# Altium PCB Orient.PcbDoc (part 1 of 4)
Units mil, origin at the board's own origin, x right, y up, seen from the top; angles counter-clockwise.
Board outline 3600 x 2400 mil, 4 copper layers (Top Layer, Layer 1, Layer 2, Bottom Layer), stack 23.756 mil thick; 365 components, 303 nets, 1656 pads, 303 vias.
Unrouted connection lines stored in the file: 1026.
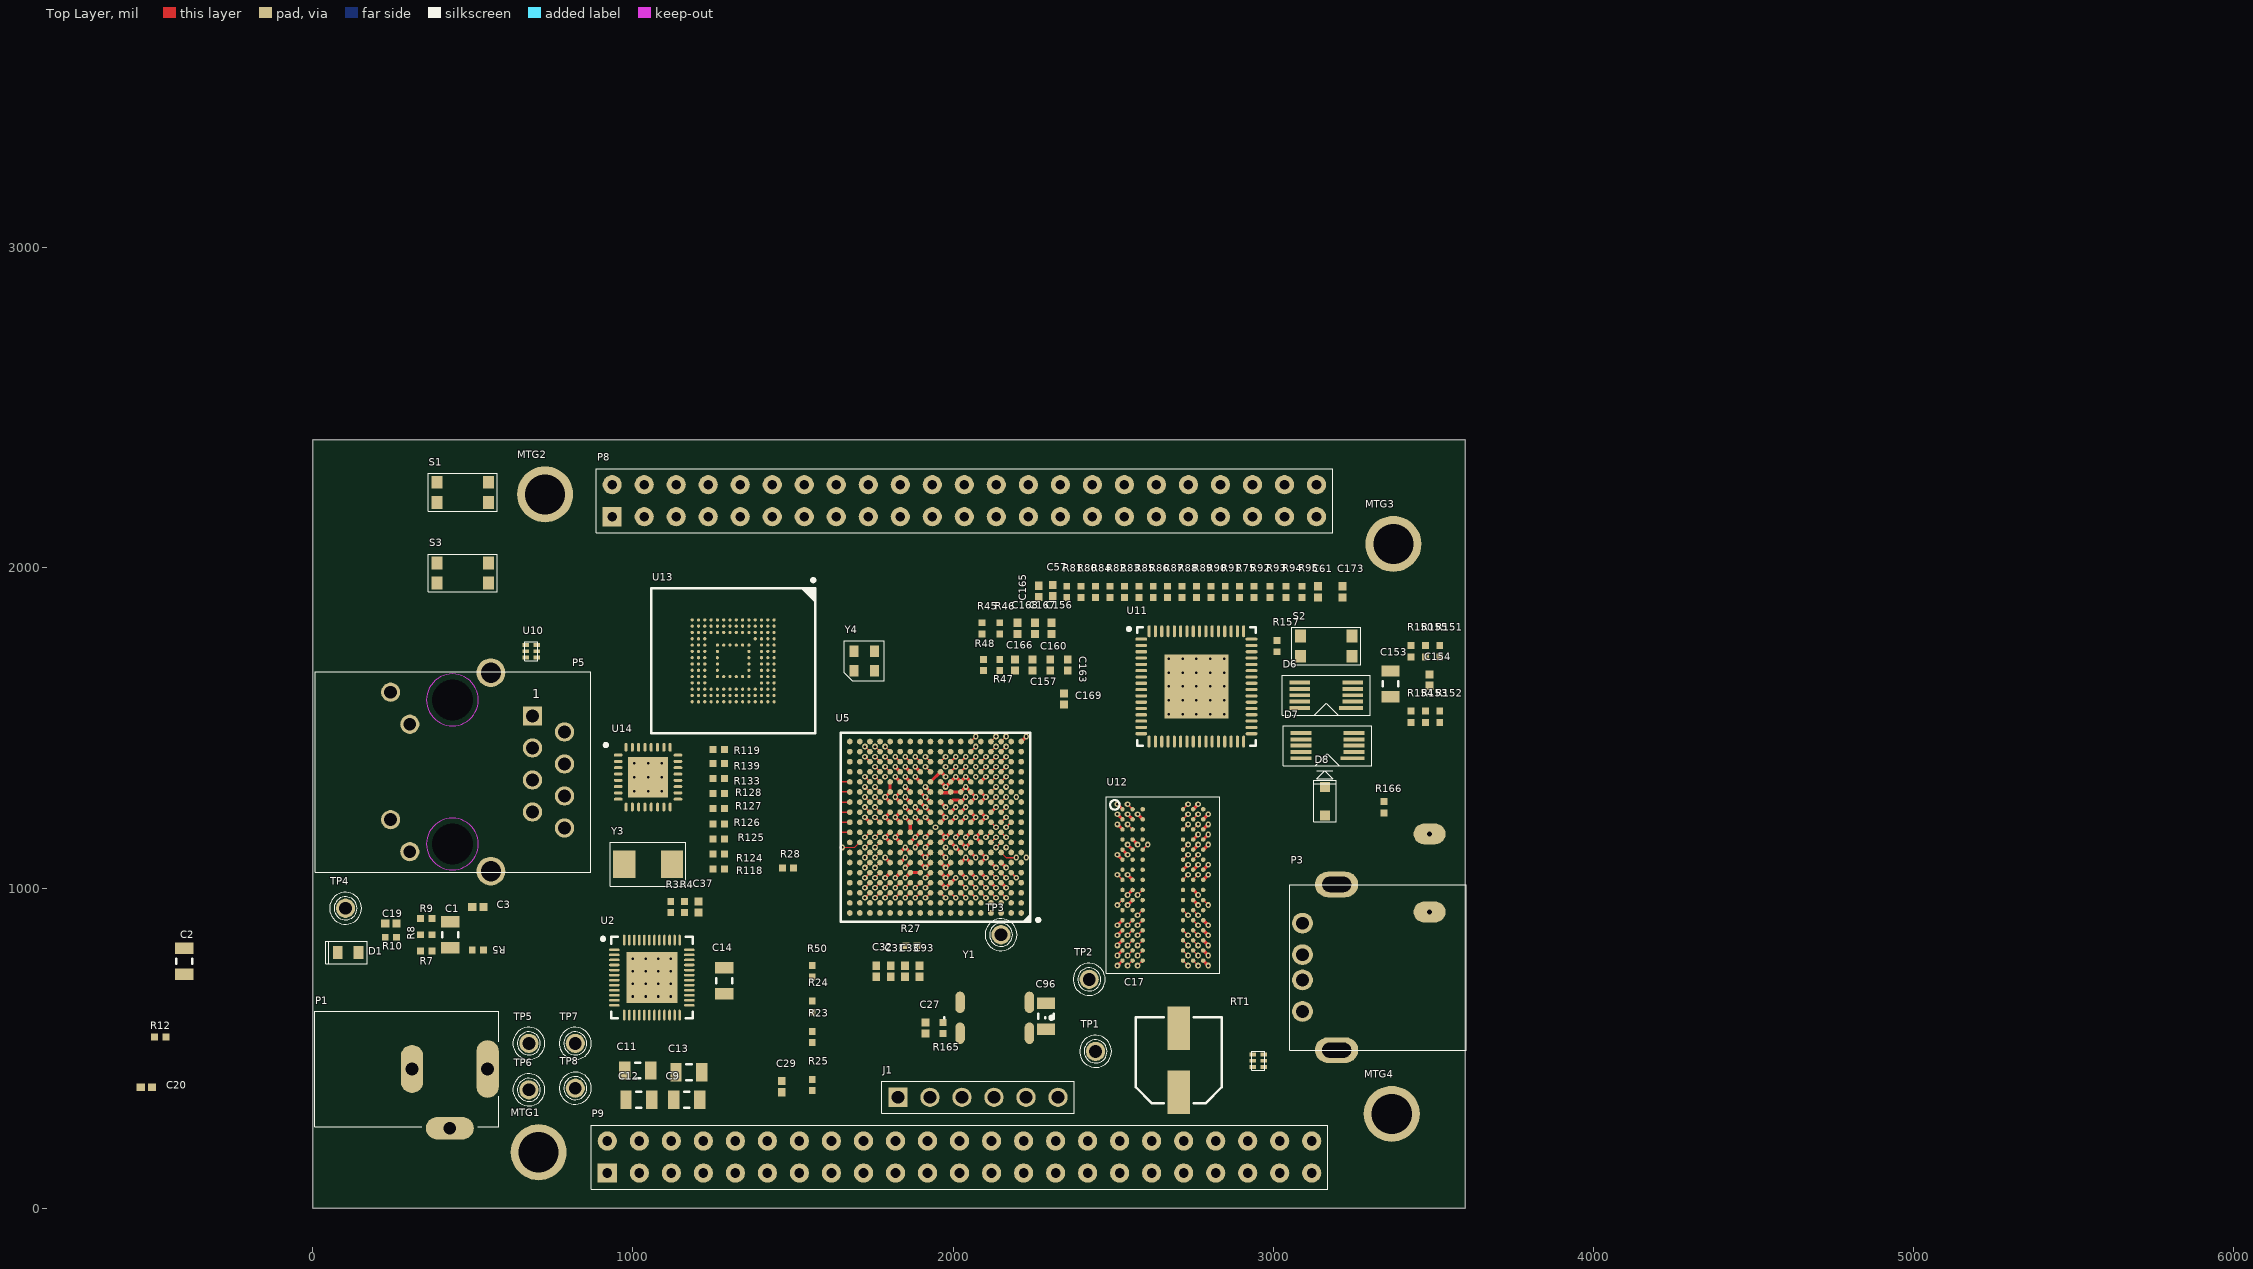
[diagram p0: Top Layer view]
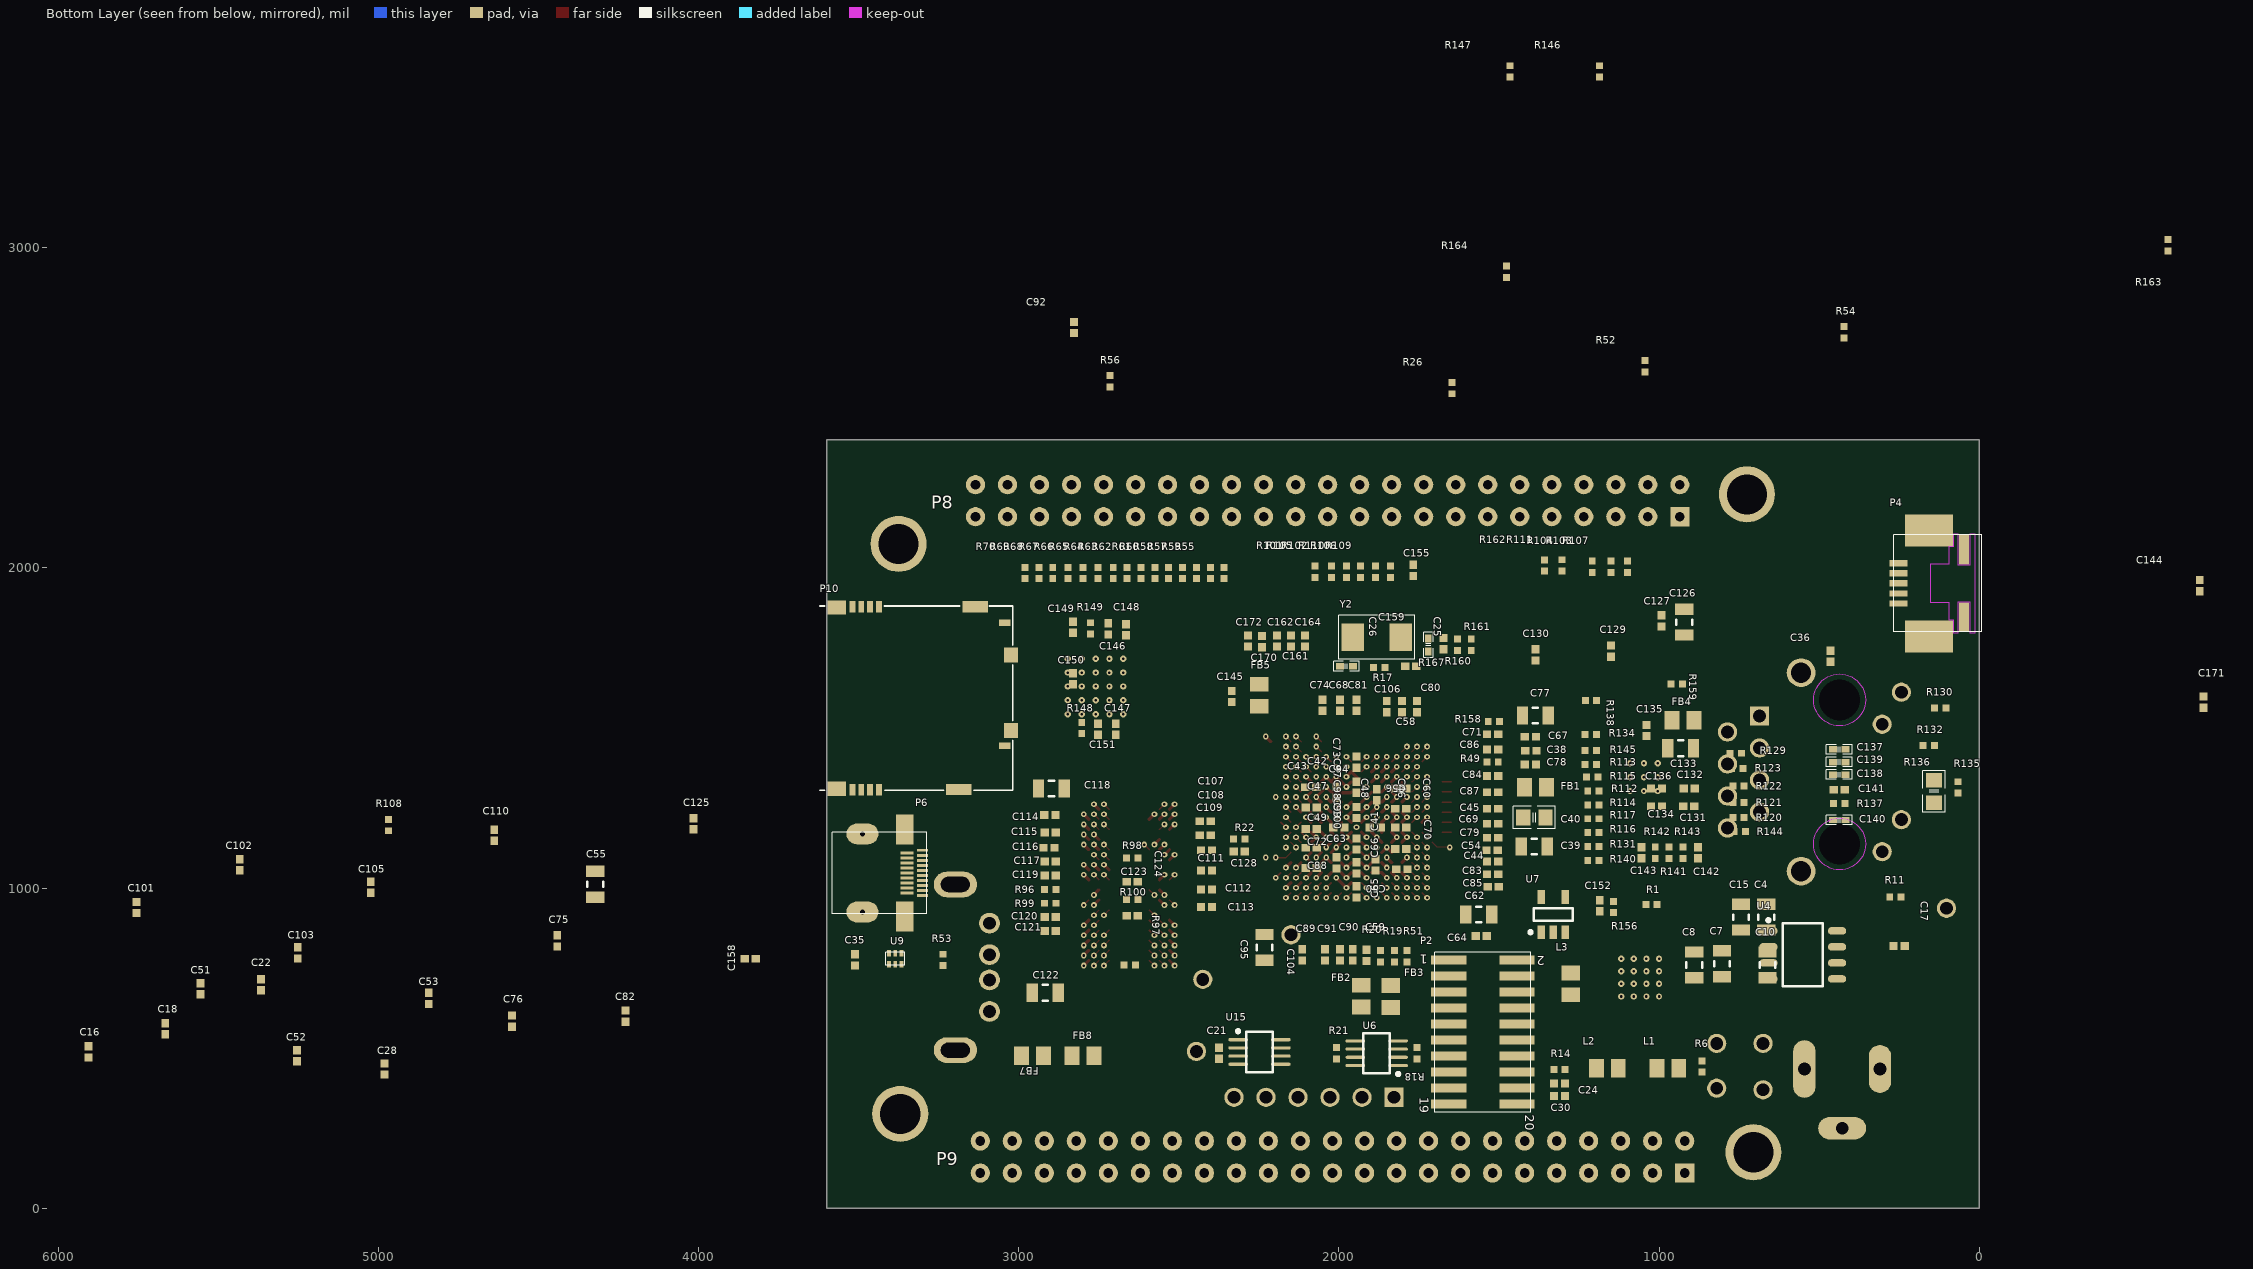
[diagram p1: Bottom Layer view, seen from below]
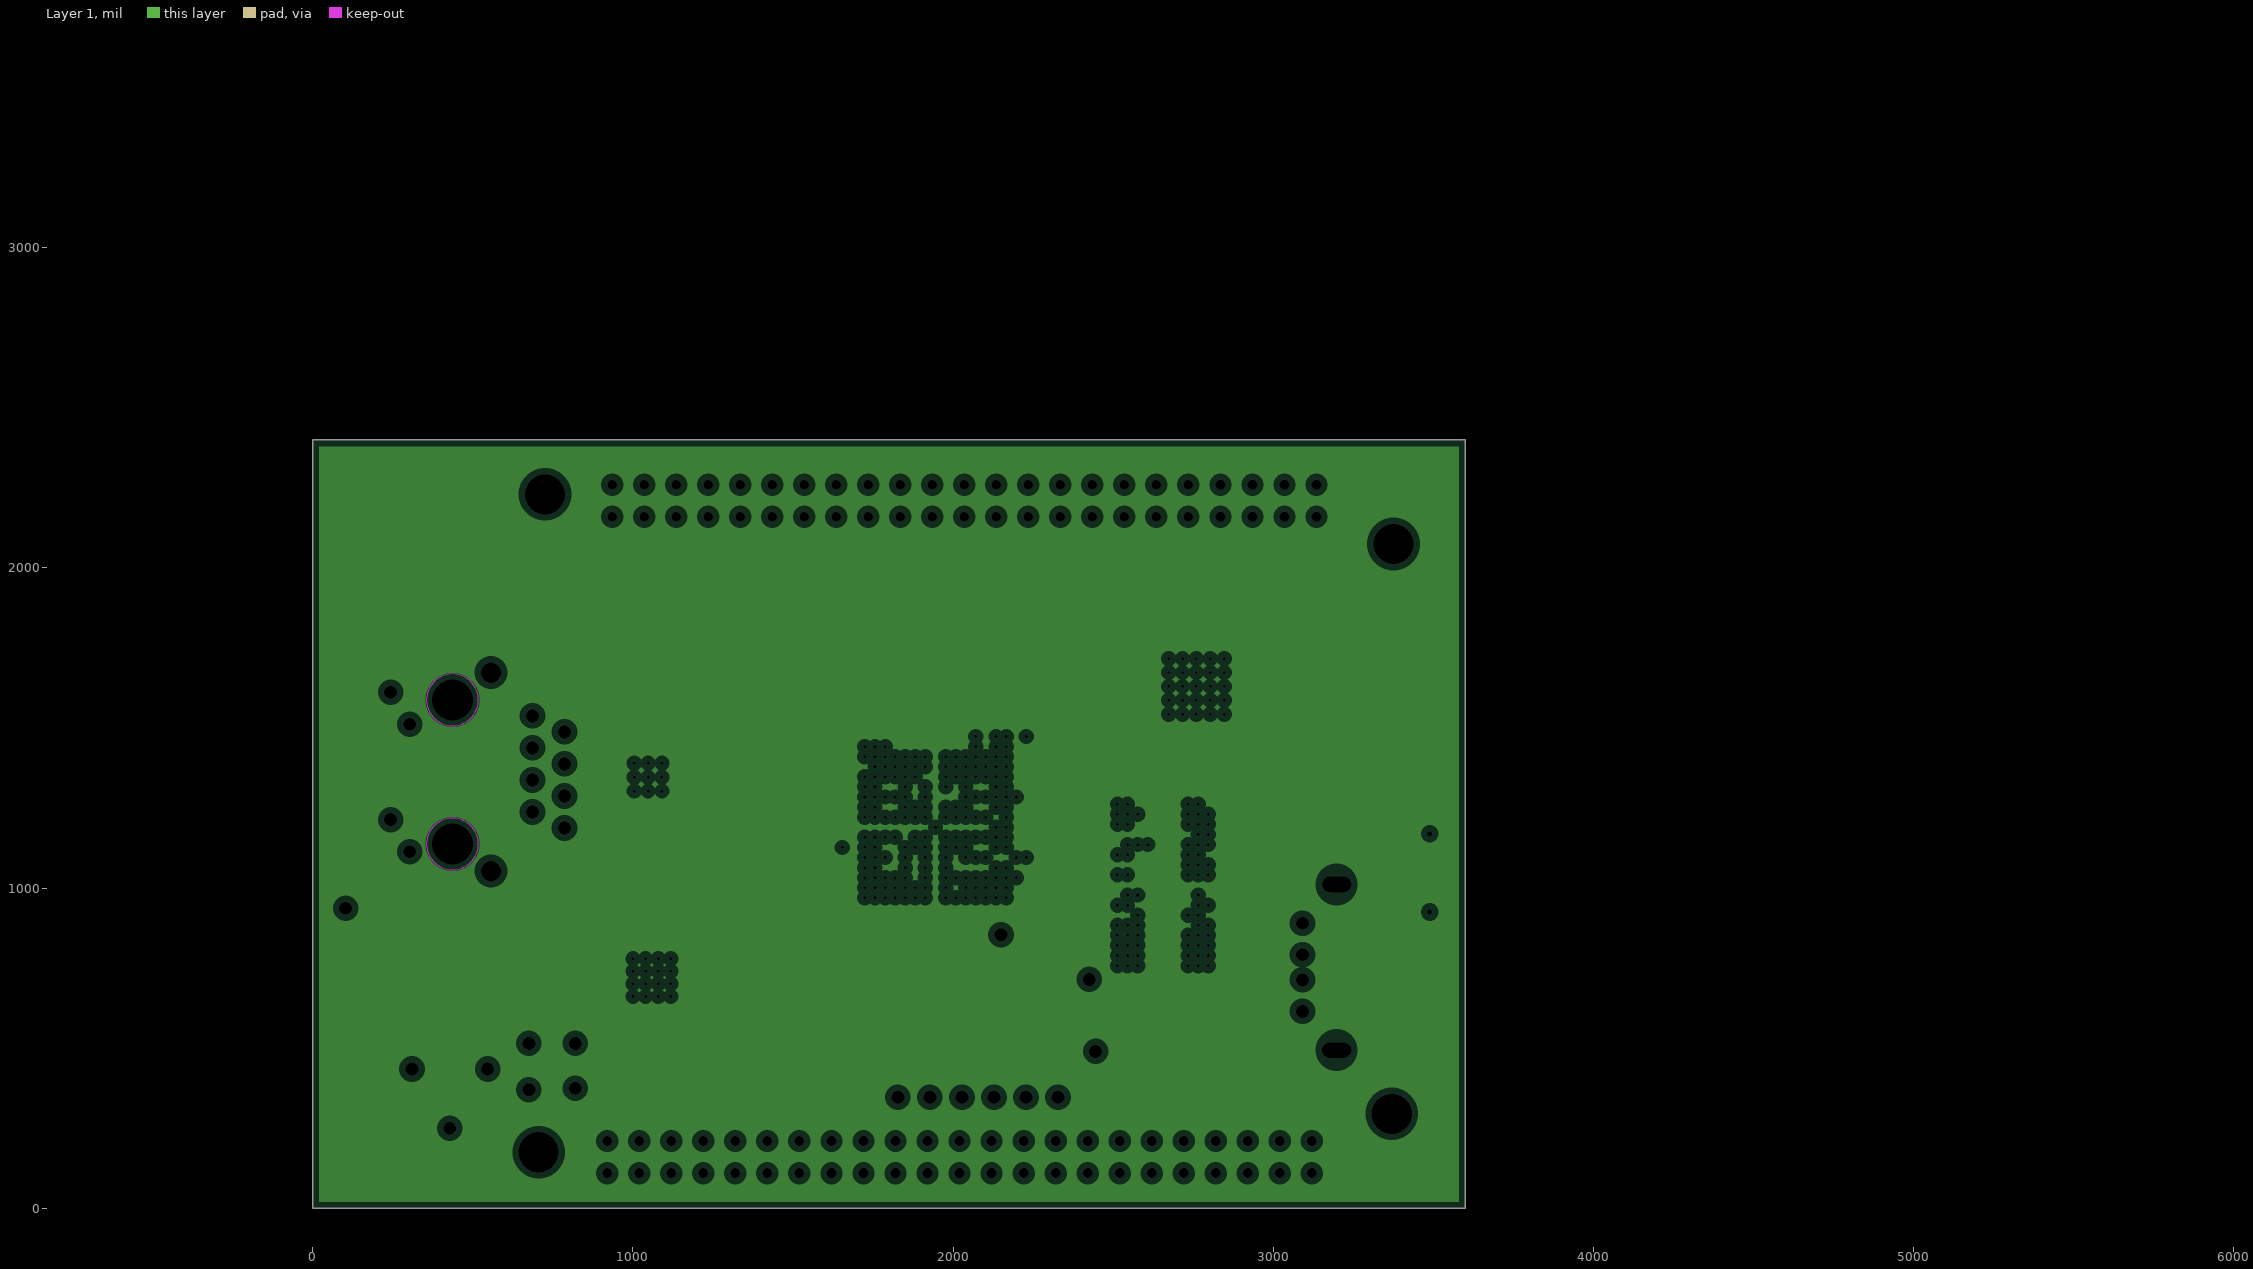
[diagram p2: Layer 1, clearances drawn from the general rule]
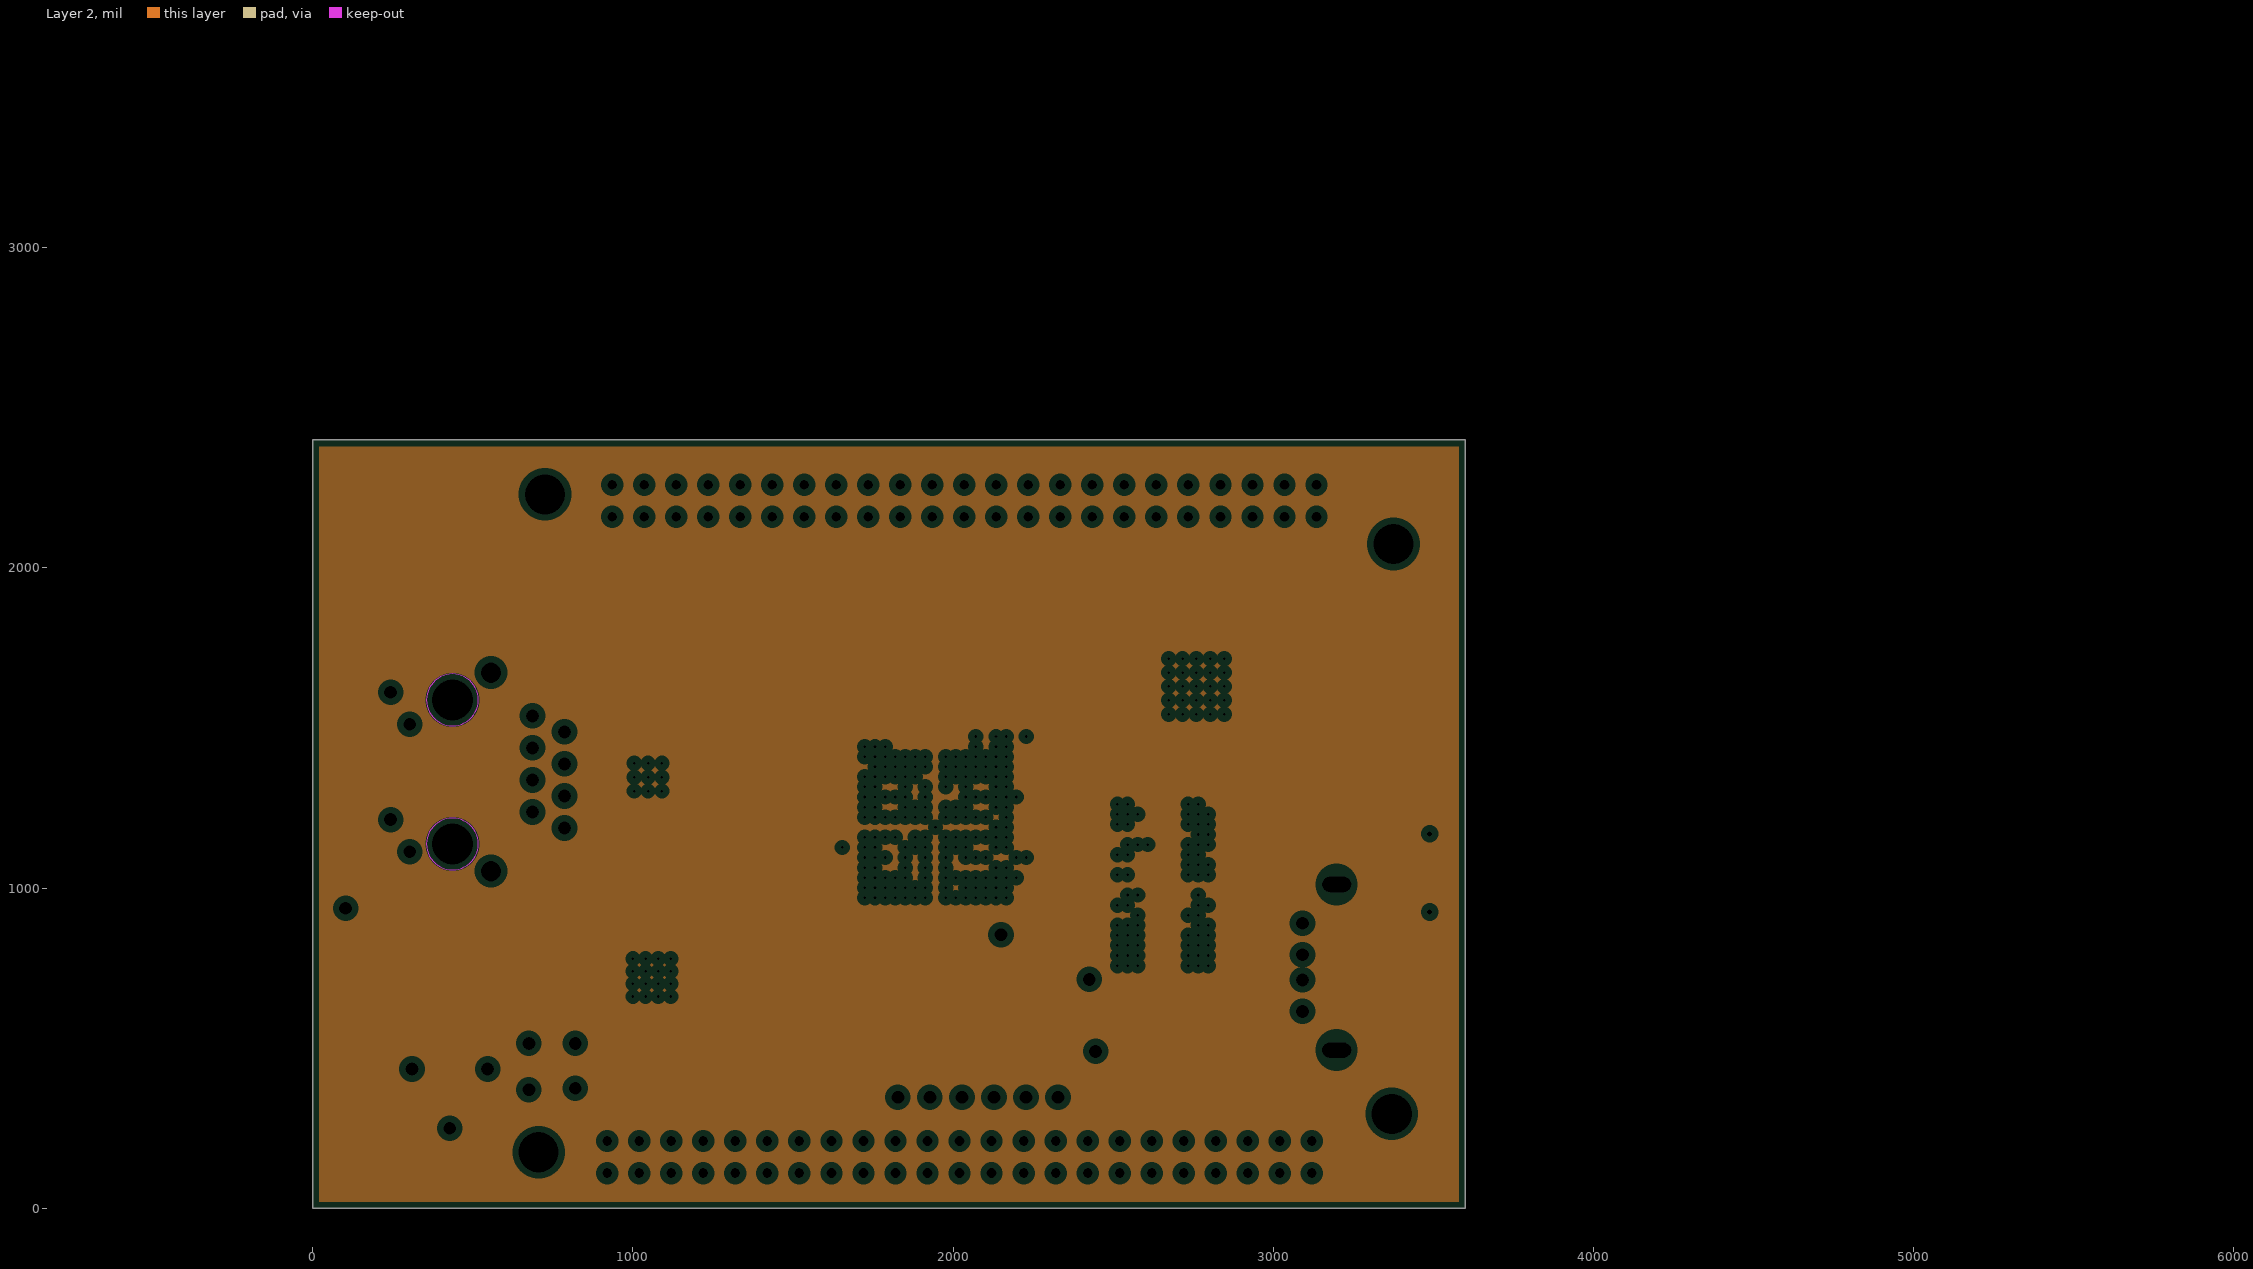
[diagram p3: Layer 2, clearances drawn from the general rule]

## Layer stack, top to bottom
Top Solder: solder mask 0.4, Solder Resist, Dk 3.5
Top Layer: signal copper 1.4
Dielectric 2: prepreg 2.8, PP-006, Dk 4.1
Layer 1: plane copper 1.3779
Dielectric 1: dielectric 12.6, FR-4, Dk 4.8
Layer 2: plane copper 1.3779
Dielectric 3: prepreg 2.8, PP-006, Dk 4.1
Bottom Layer: signal copper 1.4
Bottom Solder: solder mask 0.4, Solder Resist, Dk 3.5

## Board outline
3600,2400 0,2400 0,0 3600,0

## Design rules (kind name [scope] priority, off if disabled: settings)
Clearance [All] p1: gap=10 ignorepadtopadclearanceinfootprint=FALSE except(0: Arc-Hole Track-Hole SMDPad-Hole THPad-Hole Via-Hole Fill-Hole Poly-Hole Region-Hole Text-Hole)
PlaneClearance [All] p1: clearance=20
PlaneConnect [All] p1: planeconnectstyle=Relief reliefexpansion=20 reliefentries=4 reliefconductorwidth=10 reliefairgap=10
PolygonConnect [All] p1: connectstyle=Relief reliefconductorwidth=10 reliefentries=4 polygonreliefangle="90 Angle" airgapwidth=10
RoutingVias [All] p1: holewidth=28 width=50 viastyle="Through Hole" minholewidth=28 minwidth=50 maxholewidth=28 maxwidth=50
SolderMaskExpansion [All] p1: expansion=4
Width [All] p1: maxlimit=10 minlimit=10 preferedwidth=10
28 further rules are at their usual default settings.

## Classes and differential pairs
component class "P10_HDMI Framer": C144 C145 C146 C147 C148 C149 C150 C151 C156 C157 C160 C161 C162 C163 C164 C165 C166 C167 C168 C169 C170 C171 C172 C173 D6 D7 D8 FB5 P6 R146 R147 R148 R149 R158 R166 RT1 U11
component class P09_Ethernet: C131 C132 C133 C134 C135 C136 C137 C138 C139 C140 C141 C142 C143 FB4 P5 R112 R113 R114 R115 R116 R117 R118 R119 R120 R121 R122 R123 R124 R125 R126 R127 R128 R129 R130 R131 R132 R133 R134 R135 R136 R137 R138 R139 R140 R141 R142 R143 R144 R145 U14 Y3
net class DDR_D[15..0]: DDR_D0 DDR_D1 DDR_D2 DDR_D3 DDR_D4 DDR_D5 DDR_D6 DDR_D7 DDR_D8 DDR_D9 DDR_D10 DDR_D11 DDR_D12 DDR_D13 DDR_D14 DDR_D15
net class DDR_BA[2..0]: DDR_BA0 DDR_BA1 DDR_BA2
net class DDR_A[15..0]: DDR_A0 DDR_A1 DDR_A2 DDR_A3 DDR_A4 DDR_A5 DDR_A6 DDR_A7 DDR_A8 DDR_A9 DDR_A10 DDR_A11 DDR_A12 DDR_A13 DDR_A14 DDR_A15
component class "P11_Exp Conn, uSD, and": C152 C153 C154 P8 P9 P10 R150 R151 R152 R153 R154 R155 R156 R157 TP4 U7
component class P08_eMMC: C125 C126 C127 C128 C129 C130 R101 R102 R103 R104 R105 R106 R107 R108 R109 R110 R111 U13
component class "P07_DDR3 Memory": C107 C108 C109 C110 C111 C112 C113 C114 C115 C116 C117 C118 C119 C120 C121 C122 C123 C124 R96 R97 R98 R99 R100 U12
component class "P06_LED, Config, & Button": R55 R56 R57 R58 R59 R60 R61 R62 R63 R64 R65 R66 R67 R68 R69 R70 R75 R80 R81 R82 R83 R84 R85 R86 R87 R88 R89 R90 R91 R92 R93 R94 R95 S2
component class "P05_Processor Page 3 of 3": C37 C38 C39 C40 C41 C42 C43 C44 C45 C46 C47 C48 C49 C50 C51 C52 C53 C54 C55 C56 C57 C58 C59 C60 C61 C62 C63 C64 C65 C66 C67 C68 C69 C70 C71 C72 C73 C74 C75 C76 C77 C78 C79 C80 C81 C82 C83 C84 C85 C86 C87 C88 C89 C90 C91 C92 C93 C94 C95 C96 C97 C98 C99 C100 C101 C102 C103 C104 C105 C106 FB1 FB2 FB3 R54 TP2 TP3
component class "P04_Processor 2 or 3, USB and Serial": C17 C31 C32 C33 C35 C36 C155 FB7 FB8 J1 P3 P4 R26 R27 R28 R45 R46 R47 R48 R49 R50 R51 R52 R53 R159 R163 R164 R165 U8 U9 U10 U15
component class "P03_Processor 1 of 3, JTAG Header": C21 C22 C24 C25 C26 C27 C28 C29 C30 C158 C159 P2 R14 R17 R18 R19 R20 R21 R22 R23 R24 R25 R160 R161 R162 R167 S1 U3 U5 U6 Y1 Y2 Y4
component class "P02_Power Management": C1 C2 C3 C4 C7 C8 C9 C10 C11 C12 C13 C14 C15 C16 C17 C18 C19 C20 D1 L1 L2 L3 MTG1 MTG2 MTG3 MTG4 P1 R1 R3 R4 R5 R6 R7 R8 R9 R10 R11 R12 S3 TP1 TP5 TP6 TP7 TP8 U2 U4

## Components (designator, comment, footprint, x,y, rotation, side; value= is the part's Value field where it differs from the comment)
C1 "C2012X6S1A106K085AC" CAP0805 429.13,854.33 r90 top
C2 "C2012X6S1A106K085AC" CAP0805 -401.57,771.65 r90 top
C3 "C0402C104K4RACTU" CAP0402 515.75,940.94 r180 top
C4 "C2012X6S1A106K085AC" CAP0805 665.35,909.45 r270 bottom
C7 "C2012X6S1A106K085AC" CAP0805 803.15,763.78 r270 bottom
C8 "C2012X6S1A106K085AC" CAP0805 889.76,759.84 r270 bottom
C9 "C2012X6S1A106K085AC" CAP0805 1168.31,338.58 r180 top
C10 "C2012X6S1A106K085AC" CAP0805 661.42,759.84 r270 bottom
C11 "C2012X6S1A106K085AC" CAP0805 1015,430 r0 top
C12 "C2012X6S1A106K085AC" CAP0805 1018.7,338.58 r180 top
C13 "C2012X6S1A106K085AC" CAP0805 1175,425 r0 top
C14 "C2012X6S1A106K085AC" CAP0805 1285,710.79 r90 top
C15 "C2012X6S1A106K085AC" CAP0805 744.09,909.45 r270 bottom
C16 "C1005X5R0J225K050BC" CAP0402 5905.64,488.49 r90 bottom
C17 "EEE-0JA101SP" CAP6.6x6.6 2704.72,462.6 r90 top
C17 "C1005X5R0J225K050BC" CAP0402 250.39,818.9 r180 bottom
C18 "C1005X5R0J225K050BC" CAP0402 5665.48,560.93 r90 bottom
C19 "GRM155R71H471KA01D" CAP0402 244.09,889.76 r180 top
C20 "C0402C104K4RACTU" CAP0402 -519.68,377.95 r180 top
C21 "18pF, 50V" CAP0402 2374.02,484.25 r270 bottom
C22 "18pF, 50V" CAP0402 5366.14,697.79 r90 bottom
C24 "1uF, 10V" CAP0402 1311.02,389.76 r180 bottom
C25 "18pF, 50V" CAP0402 1775.28,1692.91 r180 bottom
C26 "18pF, 50V" 402 1976.38,1692.91 r180 bottom
C27 "C0402C104K4RACTU" CAP0402 1913.39,562.99 r90 top
C28 "C0402C104K4RACTU" CAP0402 4980.44,434.94 r90 bottom
C29 "C0402C104K4RACTU" CAP0402 1465,380 r90 top
C30 "C0402C104K4RACTU" CAP0402 1311.02,350.39 r180 bottom
C31 "C0402C104K4RACTU" CAP0402 1805,740 r90 top
C32 "1nF, 50V" CAP0402 1760,740 r90 top
C33 "C0402C104K4RACTU" CAP0402 1850,740 r90 top
C35 "C0402C104K4RACTU" CAP0402 3511.81,775.59 r270 bottom
C36 "C0402C104K4RACTU" CAP0402 464.57,1724.41 r90 bottom
C37 "C0402C104K4RACTU" CAP0402 1204.72,940.94 r90 top
C38 "C0402C104K4RACTU" CAP0402 1400.32,1429.13 r180 bottom
C39 "10uF, 10V" CAP0805 1389.76,1129.92 r180 bottom
C40 "10uF, 10V" 805 1389.76,1220.47 r180 bottom
C41 "C0402C104K4RACTU" CAP0402 1807.09,1311.02 r0 bottom
C42 "C0402C104K4RACTU" CAP0402 1945,1314.96 r90 bottom
C43 "C0402C104K4RACTU" CAP0402 2007.87,1299.21 r90 bottom
C44 "C0402C104K4RACTU" CAP0402 1520,1082.68 r180 bottom
C45 "C0402C104K4RACTU" CAP0402 1520,1248.03 r0 bottom
C46 "C0402C104K4RACTU" CAP0402 1885.83,1188.98 r180 bottom
C47 "C0402C104K4RACTU" CAP0402 1945,1236.22 r90 bottom
C48 "C0402C104K4RACTU" CAP0402 2000,1188.98 r180 bottom
C49 "C0402C104K4RACTU" CAP0402 1945,1137.8 r90 bottom
C50 "C0402C104K4RACTU" CAP0402 2007.87,1078.74 r270 bottom
C51 "C0402C104K4RACTU" CAP0402 5555.24,685.34 r90 bottom
C52 "C0402C104K4RACTU" CAP0402 5253.67,476.48 r90 bottom
C53 "C0402C104K4RACTU" CAP0402 4842.65,655.42 r90 bottom
C54 "C0402C104K4RACTU" CAP0402 1521.57,1118.11 r180 bottom
C55 "10uF, 10V" CAP0805 4322.83,1011.81 r90 bottom
C56 "C0402C104K4RACTU" CAP0402 1945,1393.7 r270 bottom
C57 "C0402C104K4RACTU" CAP0402 2311.02,1929.13 r90 top
C58 "C0402C104K4RACTU" CAP0402 1803.15,1566.93 r90 bottom
C59 "C0402C104K4RACTU" CAP0402 1913.39,789.76 r90 bottom
C60 "C0402C104K4RACTU" CAP0402 1807.09,1188.98 r180 bottom
C61 "C0402C104K4RACTU" CAP0402 3140,1925 r90 top
C62 "10uF, 10V" CAP0805 1562.99,917.32 r180 bottom
C63 "C0402C104K4RACTU" CAP0402 1885.83,1072.44 r90 bottom
C64 "C0402C104K4RACTU" CAP0402 1555.12,850.39 r0 bottom
C65 "C0402C104K4RACTU" CAP0402 1807.09,1122.05 r0 bottom
C66 "C0402C104K4RACTU" CAP0402 1807.09,1248.03 r0 bottom
C67 "C0402C104K4RACTU" CAP0402 1401.89,1472.44 r180 bottom
C68 "C0402C104K4RACTU" CAP0402 1996.06,1570.87 r90 bottom
C69 "C0402C104K4RACTU" CAP0402 1520,1200.79 r180 bottom
C70 "C0402C104K4RACTU" CAP0402 1803.15,1059.06 r180 bottom
C71 "C0402C104K4RACTU" CAP0402 1520,1480.31 r180 bottom
C72 "C0402C104K4RACTU" CAP0402 1945,1062.99 r90 bottom
C73 "C0402C104K4RACTU" CAP0402 2088.19,1314.96 r180 bottom
C74 "C0402C104K4RACTU" CAP0402 2051.18,1570.87 r90 bottom
C75 "C0402C104K4RACTU" CAP0402 4441.07,834.94 r90 bottom
C76 "C0402C104K4RACTU" CAP0402 4582.8,584.55 r90 bottom
C77 "10uF, 10V" CAP0805 1386.14,1539.37 r180 bottom
C78 "C0402C104K4RACTU" CAP0402 1401.89,1385.83 r180 bottom
C79 "C0402C104K4RACTU" CAP0402 1520,1157.48 r180 bottom
C80 "C0402C104K4RACTU" CAP0402 1755.91,1566.93 r90 bottom
C81 "C0402C104K4RACTU" CAP0402 1944.88,1570.87 r90 bottom
C82 "C0402C104K4RACTU" CAP0402 4228.47,600.3 r90 bottom
C83 "C0402C104K4RACTU" CAP0402 1520,1043.31 r180 bottom
C84 "C0402C104K4RACTU" CAP0402 1520,1350.39 r0 bottom
C85 "C0402C104K4RACTU" CAP0402 1518.11,1003.94 r180 bottom
C86 "C0402C104K4RACTU" CAP0402 1520,1433.07 r180 bottom
C87 "C0402C104K4RACTU" CAP0402 1520,1299.21 r0 bottom
C88 "C0402C104K4RACTU" CAP0402 1945,988.19 r90 bottom
C89 "1uF, 10V" CAP0402 2043.31,791.34 r90 bottom
C90 "1uF, 10V" CAP0402 1956.69,791.34 r90 bottom
C91 "1uF, 10V" CAP0402 1996.06,791.34 r90 bottom
C92 "C0402C104K4RACTU" CAP0402 2827.17,2751.05 r90 bottom
C93 "C0402C104K4RACTU" CAP0402 1895,740 r90 top
C94 "C0402C104K4RACTU" CAP0402 1881.89,1291.34 r90 bottom
C95 "10uF, 10V" CAP0805 2232.28,814.53 r90 bottom
C96 "10uF, 10V" CAP0805 2290,600 r90 top
C97 "C0402C104K4RACTU" CAP0402 2086.61,1251.97 r180 bottom
C98 "C0402C104K4RACTU" CAP0402 2086.61,1185.04 r180 bottom
C99 "C0402C104K4RACTU" CAP0402 2086.61,1125.98 r180 bottom
C100 "C0402C104K4RACTU" CAP0402 2086.61,1062.99 r180 bottom
C101 "C0402C104K4RACTU" CAP0402 5755.91,939.37 r90 bottom
C102 "C0402C104K4RACTU" CAP0402 5433.07,1073.23 r90 bottom
C103 "C0402C104K4RACTU" CAP0402 5251.97,797.64 r90 bottom
C104 "1uF, 10V" CAP0402 2114.17,791.34 r90 bottom
C105 "C0402C104K4RACTU" CAP0402 5023.62,1002.36 r90 bottom
C106 "C0402C104K4RACTU" CAP0402 1850.39,1566.93 r90 bottom
C107 "0.1uf, 6V3" CAP0402 2417.32,1208.66 r180 bottom
C108 "0.1uf, 6V3" CAP0402 2417.32,1165.35 r180 bottom
C109 "0.1uf, 6V3" CAP0402 2413.39,1118.11 r180 bottom
C110 "0.1uf, 6V3" CAP0402 4637.8,1165.04 r90 bottom
C111 "0.1uf, 6V3" CAP0402 2413.39,1055.12 r180 bottom
C112 "0.1uf, 6V3" CAP0402 2413.39,996.06 r180 bottom
C113 "0.1uf, 6V3" CAP0402 2413.39,940.94 r180 bottom
C114 "0.1uf, 6V3" CAP0402 2902.51,1228.35 r180 bottom
C115 "0.1uf, 6V3" CAP0402 2901.57,1173.23 r180 bottom
C116 "0.1uf, 6V3" CAP0402 2905.51,1125.98 r180 bottom
C117 "0.1uf, 6V3" CAP0402 2901.57,1082.68 r180 bottom
C118 "10uF, 10V" CAP0805 2897.64,1311.02 r180 bottom
C119 "0.1uf, 6V3" CAP0402 2901.57,1039.37 r180 bottom
C120 "0.1uf, 6V3" CAP0402 2901.57,909.45 r180 bottom
C121 "0.1uf, 6V3" CAP0402 2901.57,866.14 r180 bottom
C122 "10uF, 10V" CAP0805 2917.32,673.23 r0 bottom
C123 "No Comment" CAP0402 2645.67,1019.68 r180 bottom
C124 "0.1uf, 6V3" CAP0402 2645.67,913.39 r180 bottom
C125 "No Comment" CAP0402 4015.75,1200.79 r90 bottom
C126 "10uF, 10V" CAP0805 921.26,1830.71 r270 bottom
C127 "No Comment" CAP0402 992.13,1834.65 r90 bottom
C128 "No Comment" CAP0402 2311.02,1114.17 r0 bottom
C129 "No Comment" CAP0402 1149.61,1740.16 r90 bottom
C130 "No Comment" CAP0402 1385.83,1728.35 r90 bottom
C131 "C0402C104K4RACTU" CAP0402 907.09,1255.91 r0 bottom
C132 "C0402C104K4RACTU" CAP0402 905.51,1311.02 r0 bottom
C133 "10uF, 10V" CAP0805 932.64,1437.01 r180 bottom
C134 "1uF, 10V" CAP0402 1007.87,1255.91 r180 bottom
C135 "C0402C104K4RACTU" CAP0402 1039.37,1492.13 r270 bottom
C136 "470pF, 50V" CAP0402 1007.87,1311.02 r180 bottom
C137 "15pF, DNI" 402 437.01,1433.07 r180 bottom
C138 "15pF, DNI" 402 437.01,1354.33 r180 bottom
C139 "15pF, DNI" 402 437.01,1393.7 r180 bottom
C140 "15pF, DNI" 402 437.01,1212.6 r180 bottom
C141 "0.022uF,10V" CAP0402 437.01,1307.09 r180 bottom
C142 "30pF, 50V" CAP0402 877.95,1110.24 r270 bottom
C143 "30pF, 50V" CAP0402 1055.12,1110.24 r90 bottom
C144 "No Comment" CAP0402 -688.98,1944.88 r90 bottom
C145 "No Comment" CAP0402 2334.65,1598.43 r270 bottom
C146 "No Comment" CAP0402 2720.47,1809.45 r90 bottom
C147 "No Comment" CAP0402 2696.85,1496.06 r90 bottom
C148 "No Comment" CAP0402 2665.35,1807.09 r90 bottom
C149 "No Comment" CAP0402 2830.71,1814.96 r90 bottom
C150 "No Comment" CAP0402 2830.71,1653.54 r90 bottom
C151 "No Comment" CAP0402 2751.97,1496.06 r90 bottom
C152 "C0402C104K4RACTU" CAP0402 1185.04,944.88 r90 bottom
C153 "10uF, 10V" CAP0805 3366.14,1637.8 r90 top
C154 "C0402C104K4RACTU" CAP0402 3488.19,1649.61 r90 top
C155 "C0402C104K4RACTU" CAP0402 1767.72,1992.13 r270 bottom
C156 "No Comment" CAP0402 2307.09,1811.02 r90 top
C157 "No Comment" CAP0402 2248.03,1696.85 r90 top
C158 "C0402C104K4RACTU" CAP0402 3838.58,779.53 r0 bottom
C159 "C0402C104K4RACTU" CAP0402 1673.23,1763.78 r90 bottom
C160 "No Comment" CAP0402 2303.15,1696.85 r90 top
C161 "No Comment" CAP0402 2149.61,1771.65 r90 bottom
C162 "No Comment" CAP0402 2192.91,1771.65 r90 bottom
C163 "No Comment" CAP0402 2358.27,1696.85 r90 top
C164 "No Comment" CAP0402 2106.3,1771.65 r90 bottom
C165 "No Comment" CAP0402 2267.72,1926.77 r90 top
C166 "No Comment" CAP0402 2192.91,1696.85 r90 top
C167 "No Comment" CAP0402 2255.91,1811.02 r90 top
C168 "No Comment" CAP0402 2200.79,1811.02 r90 top
C169 "No Comment" CAP0402 2346.46,1590.55 r90 top
C170 "No Comment" CAP0402 2240.16,1770.08 r90 bottom
C171 "No Comment" CAP0402 -700.79,1581.1 r90 bottom
C172 "No Comment" CAP0402 2283.46,1771.65 r90 bottom
C173 "No Comment" CAP0402 3216.54,1925.2 r90 top
D1 "598-8170-107F" LED_0603 110.24,799.21 r0 top
D6 "32CTQ030/TO_1" TSSOP10 3165.35,1602.36 r90 top
D7 "32CTQ030/TO_1" TSSOP10 3169.29,1444.88 r90 top
D8 "RB751V40,115" SOD323 3161.42,1271.65 r90 top
FB1 "150OHM800mA" FB0805 1386.14,1314.96 r180 bottom
FB2 "150OHM800mA" FB0805 1929.41,662.52 r90 bottom
FB3 "150OHM800mA" FB0805 1838.58,661.42 r90 bottom
FB4 "150OHM800mA" FB0805 925.2,1523.62 r180 bottom
FB5 "150OHM800mA" FB0805 2248.03,1602.36 r90 bottom
FB7 "150OHM800mA" FB0805 2956.69,476.38 r180 bottom
FB8 "150OHM800mA" FB0805 2799.21,476.38 r180 bottom
J1 "HEADER 6" SIP6 2077.56,346.46 r90 top
L1 "2.2uH, 2.6A" FB0805 972.44,437.01 r180 bottom
L2 "2.2uH, 2.6A" FB0805 1161.42,437.01 r180 bottom
L3 "2.2uH, 2.6A" FB0805 1275.59,700.79 r90 bottom
MTG1 "MHOLE" MTGH200C125D_PL 690,175 r180 top
MTG2 "MHOLE" MTGH200C125D_PL 710,2230 r180 top
MTG3 "MHOLE" MTGH200C125D_PL 3359.5,2075 r180 top
MTG4 "MHOLE" MTGH200C125D_PL 3354.5,295 r180 top
P1 "PJ-200A" CONN3-PWR-PJ102A 301,435 r180 top
P2 "CTI JTAG,DNI" HEADER10X2_SMD 1550,550 r90 bottom
P3 "USB-A Conn. - 87520-xx1xx" USB_A 3326.77,751.97 r90 top
P4 "mini USB-B" USB5MINI_4SHIELDED_SMD-5 133.85,1951.77 r180 bottom
P5 "WE_7499010211A" RJ45-7499010211A 433.65,1362.81 r270 top
P6 "10118241-001RLF" CONN19_HDMI 3429.13,1047.24 r90 bottom
P8 "FEMALE HEADER 2x23" HEADER23X2 2035,2210 r0 top
P9 "FEMALE HEADER 2x23" HEADER23X2 2020,160 r0 top
P10 "MOLEX 502570-001" SD-MICRO-SCHA5B0300 3306.59,1593.5 r90 bottom
R1 "RC0402FR-07100KL" RES0402 1023.62,948.82 r0 bottom
R3 "RC0402FR-071K5L" RES0402 1118.11,940.94 r90 top
R4 "RC0402FR-071K5L" RES0402 1161.42,940.94 r90 top
R5 "RC0402JR-070RL" RES0402 515.75,807.09 r180 top
R6 "RC0402JR-070RL" RES0402 866.14,442.91 r270 bottom
R7 "RC0402JR-070RL" RES0402 354.33,803.15 r180 top
R8 "RC0402JR-070RL" RES0402 354.33,854.33 r180 top
R9 "RC0402JR-070RL" RES0402 354.33,905.51 r180 top
R10 "RC0402FR-07470KL" RES0402 244.09,846.46 r0 top
R11 "RC0402FR-07280KL" RES0402 261.81,972.44 r0 bottom
R12 "RC0402FR-07820RL" RES0402 -476.38,535.43 r0 top
R14 "10K, 1%" RES0402 1311.02,433.07 r180 bottom
R17 "1M, 1%" RES0402 1874.02,1688.98 r180 bottom
R18 "33, 0402" RES0402 1755.91,484.25 r270 bottom
R19 "RC0402JR-070RL" RES0402 1826.77,787.4 r90 bottom
R20 "RC0402JR-070RL" RES0402 1870.08,787.4 r90 bottom
R21 "33, 0402" RES0402 2007.87,484.25 r270 bottom
R22 "49.9, 1%" RES0402 2311.02,1153.54 r180 bottom
R23 "4.75K, 1%" RES0402 1560,535 r90 top
R24 "4.75K, 1%" RES0402 1560,630 r90 top
R25 "4.75K, 1%" RES0402 1560,385 r90 top
R26 "4.75K, 1%" RES0402 1646.08,2561.74 r90 bottom
R27 "RC0402JR-070RL" RES0402 1870,820 r180 top
R28 "RC0402FR-0733RL" RES0402 1484.25,1062.99 r180 top
R45 "RC0402FR-0733RL" RES0402 2090.55,1811.02 r90 top
R46 "RC0402FR-0733RL" RES0402 2145.67,1811.02 r90 top
R47 "RC0402FR-0733RL" RES0402 2145.67,1696.85 r90 top
R48 "RC0402FR-0733RL" RES0402 2094.49,1696.85 r90 top
R49 "RC0402JR-070RL" RES0402 1520,1393.7 r180 bottom
R50 "RC0402JR-070RL" RES0402 1560,740 r90 top
R51 "RC0402JR-070RL" RES0402 1787.4,787.4 r90 bottom
R52 "10k, 1%" RES0402 1043.85,2629.61 r90 bottom
R53 "10k, 1%" RES0402 3236.22,775.59 r90 bottom
R54 "10k, 1%" RES0402 421.8,2736.22 r90 bottom
R55 "100K, 1%, DNI" RES0402 2358.27,1984.25 r90 bottom
R56 "100K, 1%" RES0402 2715,2582.68 r90 bottom
R57 "100K, 1%, DNI" RES0402 2444.88,1984.25 r90 bottom
R58 "100K, 1%,DNI" RES0402 2488.19,1984.25 r90 bottom
R59 "100K, 1%, DNI" RES0402 2401.57,1984.25 r90 bottom
R60 "100K, 1%,DNI" RES0402 2531.5,1984.25 r90 bottom
R61 "100K, 1%,DNI" RES0402 2574.8,1984.25 r90 bottom
R62 "100K, 1%,DNI" RES0402 2618.11,1984.25 r90 bottom
R63 "100K, 1%,DNI" RES0402 2661.42,1984.25 r90 bottom
R64 "100K, 1%,DNI" RES0402 2704.72,1984.25 r90 bottom
R65 "100K, 1%" RES0402 2751.97,1984.25 r90 bottom
R66 "100K, 1%" RES0402 2799.21,1984.25 r90 bottom
R67 "100K, 1%" RES0402 2846.46,1984.25 r90 bottom
R68 "100K, 1%" RES0402 2893.7,1984.25 r90 bottom
R69 "100K, 1%, DNI" RES0402 2937.01,1984.25 r90 bottom
R70 "100K, 1%,DNI" RES0402 2980.31,1984.25 r90 bottom
R75 "100" RES0402 2895,1925 r270 top
R80 "100K, 1%" RES0402 2400,1925 r90 top
R81 "100K, 1%, DNI" RES0402 2355,1925 r90 top
R82 "100K, 1%" RES0402 2490,1925 r90 top
R83 "100K, 1%" RES0402 2535,1925 r90 top
R84 "100K, 1%" RES0402 2445,1925 r90 top
R85 "100K, 1%" RES0402 2580,1925 r90 top
R86 "100K, 1%" RES0402 2625,1925 r90 top
R87 "100K, 1%" RES0402 2670,1925 r90 top
R88 "100K, 1%" RES0402 2715,1925 r90 top
R89 "100K, 1%" RES0402 2760,1925 r90 top
R90 "100K, 1%, DNI" RES0402 2805,1925 r90 top
R91 "100K, 1%, DNI" RES0402 2850,1925 r270 top
R92 "100K, 1%, DNI" RES0402 2940,1925 r90 top
R93 "100K, 1%, DNI" RES0402 2990,1925 r90 top
R94 "100K, 1%" RES0402 3040,1925 r90 top
R95 "100K, 1%" RES0402 3090,1925 r90 top
R96 "10k, 1%" RES0402 2901.57,996.06 r0 bottom
R97 "1.5K, 1%" RES0402 2653.54,759.84 r180 bottom
R98 "10k, 1%" RES0402 2645.67,1094.49 r180 bottom
R99 "240, 1%" RES0402 2901.57,952.76 r0 bottom
R100 "10k, 1%" RES0402 2645.67,964.57 r180 bottom
R101 "10k, 1%" RES0402 2074.8,1988.19 r90 bottom
R102 "10k, 1%" RES0402 1976.38,1988.19 r90 bottom
R103 "10k, 1%" RES0402 1149.61,2003.62 r90 bottom
R104 "10k, 1%" RES0402 1208.66,2003.62 r90 bottom
R105 "10k, 1%" RES0402 2023.62,1988.19 r90 bottom
R106 "10k, 1%" RES0402 1885.83,1988.19 r90 bottom
R107 "10k, 1%" RES0402 1098.43,2003.62 r90 bottom
R108 "10k, 1%" RES0402 4968.5,1196.85 r90 bottom
R109 "10k, 1%" RES0402 1838.58,1988.19 r90 bottom
R110 "10k, 1%" RES0402 1933.07,1988.19 r90 bottom
R111 "10k, 1%" RES0402 1303.15,2007.87 r90 bottom
R112 "1.5K, 1%" RES0402 1205.04,1303.15 r180 bottom
R113 "1.5K, 1%" RES0402 1212.91,1385.83 r180 bottom
R114 "1.5K, 1%" RES0402 1205.04,1259.84 r180 bottom
R115 "10k, 1%" RES0402 1208.98,1346.46 r0 bottom
R116 "10k, 1%" RES0402 1205.04,1173.23 r0 bottom
R117 "10k, 1%" RES0402 1205.04,1216.54 r0 bottom
R118 "10k, 1%" RES0402 1267.72,1059.06 r180 top
R119 "1.5K, 1%" RES0402 1267.72,1433.07 r0 top
R120 "49.9, 1%" RES0402 751.97,1220.47 r0 bottom
R121 "49.9, 1%" RES0402 751.97,1267.72 r180 bottom
R122 "49.9, 1%" RES0402 751.97,1318.9 r0 bottom
R123 "49.9, 1%" RES0402 755.91,1374.02 r180 bottom
R124 "10, 1%,DNI" RES0402 1267.72,1106.3 r180 top
R125 "100, 1%" RES0402 1267.72,1153.54 r180 top
R126 "100, 1%" RES0402 1267.72,1200.79 r180 top
R127 "100, 1%" RES0402 1267.72,1248.03 r180 top
R128 "100, 1%" RES0402 1267.72,1295.28 r180 top
R129 "100, 1%" RES0402 760.16,1421.26 r180 bottom
R130 "470, 5%" RES0402 121.73,1562.99 r180 bottom
R131 "100, 1%" RES0402 1205.04,1129.92 r180 bottom
R132 "470, 5%" RES0402 157.48,1444.88 r0 bottom
R133 "100, 1%" RES0402 1267.72,1342.52 r180 top
R134 "100, 1%" RES0402 1212.91,1480.31 r180 bottom
R135 "10k, 1%" RES0402 66.39,1314.46 r90 bottom
R136 "0.1, 0805" 805 141.73,1302.21 r90 bottom
R137 "0R, 1%" RES0402 437.32,1263.78 r180 bottom
R138 "100, 1%" RES0402 1212.6,1586.61 r180 bottom
R139 "100, 1%" RES0402 1267.72,1389.76 r180 top
R140 "0R, 1%,DNI" RES0402 1205.04,1086.61 r180 bottom
R141 "1M, 1%,DNI" RES0402 968.5,1110.24 r90 bottom
R142 "0R, 1%" RES0402 1011.81,1110.24 r90 bottom
R143 "10, 1%" RES0402 925.2,1110.24 r90 bottom
R144 "12.1K, 1%" RES0402 748.03,1177.17 r180 bottom
R145 "10k, 1%" RES0402 1212.91,1429.13 r0 bottom
R146 "1.5K, 1%" RES0402 1185.58,3550.87 r90 bottom
R147 "1.5K, 1%" RES0402 1465.11,3550.87 r90 bottom
R148 "10k, 1%" RES0402 2803.15,1500 r90 bottom
R149 "0R, 1%" RES0402 2775.59,1811.02 r90 bottom
R150 "10k, 1%" RES0402 3430,1740 r270 top
R151 "10k, 1%" RES0402 3520,1740 r270 top
R152 "10k, 1%" RES0402 3520,1535 r270 top
R153 "10k, 1%" RES0402 3475,1535 r270 top
R154 "10k, 1%" RES0402 3430,1535 r270 top
R155 "10k, 1%" RES0402 3475,1740 r270 top
R156 "10k, 1%" RES0402 1141.73,940.94 r90 bottom
R157 "10k, 1%" RES0402 3011.81,1755.91 r270 top
R158 "10k, 1%" RES0402 1515.75,1519.68 r0 bottom
R159 "RC0402JR-070RL" RES0402 944.88,1637.8 r180 bottom
R160 "RC0402JR-070RL" RES0402 1629.92,1759.84 r90 bottom
R161 "RC0402JR-070RL" RES0402 1586.61,1759.84 r90 bottom
R162 "RC0402JR-070RL" RES0402 1358.27,2007.56 r90 bottom
R163 "4.75K, 1%" RES0402 -590.01,3007.87 r90 bottom
R164 "4.75K, 1%" RES0402 1476.38,2925.2 r90 bottom
R165 "RC0402FR-07100KL" RES0402 1968.5,562.99 r90 top
R166 "27K, 1%" RES0402 3346.46,1252.28 r90 top
R167 "33, 0402" 402 1720.47,1759.53 r90 bottom
RT1 "PTC_RXEF010" U_6_DRY 2952.76,460.63 r90 top
S1 "KMR231GLFS" SW4SMD_63X161LS 468.5,2236.22 r180 top
S2 "KMR231GLFS" SW4SMD_63X161LS 3165.35,1755.91 r180 top
S3 "KMR231GLFS" SW4SMD_63X161LS 468.5,1984.25 r180 top
TP1 "TESTPT1" tp1-8040 2445,490 r180 top
TP2 "TESTPT1" tp1-8040 2425,715 r270 top
TP3 "TESTPT1" tp1-8040 2149.61,854.33 r270 top
TP4 "TESTPT1" tp1-8040 102.36,937.01 r180 top
TP5 "TESTPT1" tp1-8040 675,515 r180 top
TP6 "TESTPT1" tp1-8040 675,370 r180 top
TP7 "TESTPT1" tp1-8040 820,515 r180 top
TP8 "TESTPT1" tp1-8040 820,375 r180 top
U2 "TPS65217C" PVQFN-48 1059.06,720.47 r0 top
U4 "TL5209" SOIC-8 551.18,791.34 r180 bottom
U5 "IC_AM335X_ZCE_1" BGA-324 1945,1190 r180 top
U6 "SN74LVC1G74DCTR" VSSOP-8 1881.89,484.25 r0 bottom
U7 "24LC32A" SOT-23-5 1330.71,917.32 r90 bottom
U9 "TPD4S012" U_6_DRY 3385.83,779.53 r180 bottom
U10 "TPD4S012" U_6_DRY 682.28,1739.68 r270 top
U11 "TDA19988" HVQFN-64 2759.84,1629.92 r0 top
U12 "MT41K256M16HA -125:E" BGA96_T9_P8_9X14 2655,1010 r0 top
U13 "eMMC, 2GB" WFBGA-153 1312.95,1709.84 r270 top
U14 "LAN8710A" QFN-32 1047.24,1346.46 r0 top
U15 "SN74LVC2G241" VSSOP-8 2248.03,488.19 r180 bottom
Y1 "32.768kHz" SOJ-4 2130,595 r90 top
Y2 "24MHz" XTAL150SMD_125X196 1881.89,1783.46 r0 bottom
Y3 "25.000MHz" XTAL150SMD_125X196 1047.24,1074.8 r0 top
Y4 "24.576MHz" OSC4_61X65LS_79X98SMD 1722.5,1709.5 r0 top

## Footprints (in the part's own frame and the unit in brackets; to place one, negate y for a bottom-side part, rotate by r counter-clockwise, add the part's x,y. Pads: shape width x height; smd on the part's side, far side on the other; paste and mask are expansions set on the pad)
402 [mil] "402"
  rect 25x20 smd mask+2: 1(-20,0) 2(20,0)
  silkscreen extent -40,-15 40,15
805 [mil] "805"
  rect 45x50 smd mask+2: 1(-35,0) 2(35,0)
  silkscreen extent -65,-35 65,35
BGA96_T9_P8_9X14 [mil] "BGA96_T9_P8_9X14"
  round 14 smd mask+2: A1(-126,236.25) A2(-94.5,236.25) A3(-63,236.25) A7(63,236.25) A8(94.5,236.25) A9(126,236.25) B1(-126,204.75) B2(-94.5,204.75) B3(-63,204.75) B7(63,204.75) B8(94.5,204.75) B9(126,204.75) C1(-126,173.25) C2(-94.5,173.25) C3(-63,173.25) C7(63,173.25) C8(94.5,173.25) C9(126,173.25) D1(-126,141.75) D2(-94.5,141.75) D3(-63,141.75) D7(63,141.75) D8(94.5,141.75) D9(126,141.75) E1(-126,110.25) E2(-94.5,110.25) E3(-63,110.25) E7(63,110.25) E8(94.5,110.25) E9(126,110.25) F1(-126,78.75) F2(-94.5,78.75) F3(-63,78.75) F7(63,78.75) F8(94.5,78.75) F9(126,78.75) G1(-126,47.25) G2(-94.5,47.25) G3(-63,47.25) G7(63,47.25) G8(94.5,47.25) G9(126,47.25) H1(-126,15.75) H2(-94.5,15.75) H3(-63,15.75) H7(63,15.75) H8(94.5,15.75) H9(126,15.75) J1(-126,-15.75) J2(-94.5,-15.75) J3(-63,-15.75) J7(63,-15.75) J8(94.5,-15.75) J9(126,-15.75) K1(-126,-47.25) K2(-94.5,-47.25) K3(-63,-47.25) K7(63,-47.25) K8(94.5,-47.25) K9(126,-47.25) L1(-126,-78.75) L2(-94.5,-78.75) L3(-63,-78.75) L7(63,-78.75) L8(94.5,-78.75) L9(126,-78.75) M1(-126,-110.25) M2(-94.5,-110.25) M3(-63,-110.25) M7(63,-110.25) M8(94.5,-110.25) M9(126,-110.25) N1(-126,-141.75) N2(-94.5,-141.75) N3(-63,-141.75) N7(63,-141.75) N8(94.5,-141.75) N9(126,-141.75) P1(-126,-173.25) P2(-94.5,-173.25) P3(-63,-173.25) P7(63,-173.25) P8(94.5,-173.25) P9(126,-173.25) R1(-126,-204.75) R2(-94.5,-204.75) R3(-63,-204.75) R7(63,-204.75) R8(94.5,-204.75) R9(126,-204.75) T1(-126,-236.25) T2(-94.5,-236.25) T3(-63,-236.25) T7(63,-236.25) T8(94.5,-236.25) T9(126,-236.25)
  Top Layer lines w4.75: -141.75,-63 -126,-47.25 ; -141.75,31.5 -126,15.75 ; -110.25,-252 -94.5,-236.25 ; -110.25,-220.5 -94.5,-204.75 ; -110.25,-189 -94.5,-173.25 ; -110.25,-157.5 -94.5,-141.75 ; -110.25,-126 -94.5,-110.25 ; -110.25,189 -94.5,173.25 ; -110.25,252 -94.5,236.25 ; -78.75,-252 -63,-236.25 ; -78.75,-220.5 -63,-204.75 ; -78.75,-189 -63,-173.25 ; -78.75,-157.5 -63,-141.75 ; -78.75,-126 -63,-110.25 ; -78.75,-94.5 -63,-78.75 ; -78.75,-31.5 -63,-15.75 ; -63,110.25 -47.25,126 ; 63,-236.25 78.75,-252 ; 63,-204.75 78.75,-220.5 ; 63,-173.25 78.75,-189 ; 63,-141.75 78.75,-157.5 ; 63,-78.75 78.75,-94.5 ; 63,15.75 78.75,31.5 ; 63,78.75 78.75,94.5 ; 63,110.25 78.75,126 ; 63,173.25 78.75,189 ; 63,204.75 78.75,220.5 ; 63,236.25 78.75,252 ; 94.5,-236.25 110.25,-252 ; 94.5,-204.75 110.25,-220.5 ; 94.5,-173.25 110.25,-189 ; 94.5,-141.75 110.25,-157.5 ; 94.5,-110.25 110.25,-126 ; 94.5,-78.75 110.25,-94.5 ; 94.5,15.75 110.25,31.5 ; 94.5,78.75 110.25,94.5 ; 94.5,173.25 110.25,189 ; 94.5,204.75 110.25,220.5 ; 126,-47.25 141.75,-63
  Top Layer lines w10: -141.75,-252 -126,-236.25 ; -141.75,-220.5 -126,-204.75 ; -141.75,-189 -126,-173.25 ; -141.75,-157.5 -126,-141.75 ; -141.75,-126 -126,-110.25 ; -141.75,94.5 -126,78.75 ; -141.75,189 -126,173.25 ; -141.75,220.5 -126,204.75 ; -141.75,252 -126,236.25 ; -126,110.25 -110.25,94.5 ; -110.25,-63 -94.5,-47.25 ; -110.25,-31.5 -94.5,-15.75 ; -110.25,31.5 -94.5,15.75 ; -110.25,126 -94.5,110.25 ; -110.25,220.5 -94.5,204.75 ; -94.5,141.75 -78.75,126 ; -78.75,220.5 -63,204.75 ; 63,47.25 78.75,63 ; 94.5,-47.25 110.25,-63 ; 94.5,-15.75 110.25,-31.5 ; 94.5,47.25 110.25,63 ; 94.5,110.25 110.25,126 ; 94.5,141.75 110.25,157.5 ; 94.5,236.25 110.25,252 ; 126,-236.25 141.75,-252 ; 126,-204.75 141.75,-220.5 ; 126,-173.25 141.75,-189 ; 126,-141.75 141.75,-157.5 ; 126,-110.25 141.75,-126 ; 126,15.75 141.75,31.5 ; 126,47.25 141.75,63 ; 126,110.25 141.75,126 ; 126,141.75 141.75,157.5 ; 126,173.25 141.75,189 ; 126,204.75 141.75,220.5
  silkscreen extent -177,-276 177,276
BGA-324 [mm] "BGA, 324-Leads, Body 15.00x15.00mmx1.40mm, Pitch 0.80mm"
  round 0.45 smd: A1(-6.8,6.8) A2(-6,6.8) A3(-5.2,6.8) A4(-4.4,6.8) A5(-3.6,6.8) A6(-2.8,6.8) A7(-2,6.8) A8(-1.2,6.8) A9(-0.4,6.8) A10(0.4,6.8) A11(1.2,6.8) A12(2,6.8) A13(2.8,6.8) A14(3.6,6.8) A15(4.4,6.8) A16(5.2,6.8) A17(6,6.8) A18(6.8,6.8) B1(-6.8,6) B2(-6,6) B3(-5.2,6) B4(-4.4,6) B5(-3.6,6) B6(-2.8,6) B7(-2,6) B8(-1.2,6) B9(-0.4,6) B10(0.4,6) B11(1.2,6) B12(2,6) B13(2.8,6) B14(3.6,6) B15(4.4,6) B16(5.2,6) B17(6,6) B18(6.8,6) C1(-6.8,5.2) C2(-6,5.2) C3(-5.2,5.2) C4(-4.4,5.2) C5(-3.6,5.2) C6(-2.8,5.2) C7(-2,5.2) C8(-1.2,5.2) C9(-0.4,5.2) C10(0.4,5.2) C11(1.2,5.2) C12(2,5.2) C13(2.8,5.2) C14(3.6,5.2) C15(4.4,5.2) C16(5.2,5.2) C17(6,5.2) C18(6.8,5.2) D1(-6.8,4.4) D2(-6,4.4) D3(-5.2,4.4) D4(-4.4,4.4) D5(-3.6,4.4) D6(-2.8,4.4) D7(-2,4.4) D8(-1.2,4.4) D9(-0.4,4.4) D10(0.4,4.4) D11(1.2,4.4) D12(2,4.4) D13(2.8,4.4) D14(3.6,4.4) D15(4.4,4.4) D16(5.2,4.4) D17(6,4.4) D18(6.8,4.4) E1(-6.8,3.6) E2(-6,3.6) E3(-5.2,3.6) E4(-4.4,3.6) E5(-3.6,3.6) E6(-2.8,3.6) E7(-2,3.6) E8(-1.2,3.6) E9(-0.4,3.6) E10(0.4,3.6) E11(1.2,3.6) E12(2,3.6) E13(2.8,3.6) E14(3.6,3.6) E15(4.4,3.6) E16(5.2,3.6) E17(6,3.6) E18(6.8,3.6) F1(-6.8,2.8) F2(-6,2.8) F3(-5.2,2.8) F4(-4.4,2.8) F5(-3.6,2.8) F6(-2.8,2.8) F7(-2,2.8) F8(-1.2,2.8) F9(-0.4,2.8) F10(0.4,2.8) F11(1.2,2.8) F12(2,2.8) F13(2.8,2.8) F14(3.6,2.8) F15(4.4,2.8) F16(5.2,2.8) F17(6,2.8) F18(6.8,2.8) G1(-6.8,2) G2(-6,2) G3(-5.2,2) G4(-4.4,2) G5(-3.6,2) G6(-2.8,2) G7(-2,2) G8(-1.2,2) G9(-0.4,2) G10(0.4,2) G11(1.2,2) G12(2,2) G13(2.8,2) G14(3.6,2) G15(4.4,2) G16(5.2,2) G17(6,2) G18(6.8,2) H1(-6.8,1.2) H2(-6,1.2) H3(-5.2,1.2) H4(-4.4,1.2) H5(-3.6,1.2) H6(-2.8,1.2) H7(-2,1.2) H8(-1.2,1.2) H9(-0.4,1.2) H10(0.4,1.2) H11(1.2,1.2) H12(2,1.2) H13(2.8,1.2) H14(3.6,1.2) H15(4.4,1.2) H16(5.2,1.2) H17(6,1.2) H18(6.8,1.2) J1(-6.8,0.4) J2(-6,0.4) J3(-5.2,0.4) J4(-4.4,0.4) J5(-3.6,0.4) J6(-2.8,0.4) J7(-2,0.4) J8(-1.2,0.4) J9(-0.4,0.4) J10(0.4,0.4) J11(1.2,0.4) J12(2,0.4) J13(2.8,0.4) J14(3.6,0.4) J15(4.4,0.4) J16(5.2,0.4) J17(6,0.4) J18(6.8,0.4) K1(-6.8,-0.4) K2(-6,-0.4) K3(-5.2,-0.4) K4(-4.4,-0.4) K5(-3.6,-0.4) K6(-2.8,-0.4) K7(-2,-0.4) K8(-1.2,-0.4) K9(-0.4,-0.4) K10(0.4,-0.4) K11(1.2,-0.4) K12(2,-0.4) K13(2.8,-0.4) K14(3.6,-0.4) K15(4.4,-0.4) K16(5.2,-0.4) K17(6,-0.4) K18(6.8,-0.4) L1(-6.8,-1.2) L2(-6,-1.2) L3(-5.2,-1.2) L4(-4.4,-1.2) L5(-3.6,-1.2) L6(-2.8,-1.2) L7(-2,-1.2) L8(-1.2,-1.2) L9(-0.4,-1.2) L10(0.4,-1.2) L11(1.2,-1.2) L12(2,-1.2) L13(2.8,-1.2) L14(3.6,-1.2) L15(4.4,-1.2) L16(5.2,-1.2) L17(6,-1.2) L18(6.8,-1.2) M1(-6.8,-2) M2(-6,-2) M3(-5.2,-2) M4(-4.4,-2) M5(-3.6,-2) M6(-2.8,-2) M7(-2,-2) M8(-1.2,-2) M9(-0.4,-2) M10(0.4,-2) M11(1.2,-2) M12(2,-2) M13(2.8,-2) M14(3.6,-2) M15(4.4,-2) M16(5.2,-2) M17(6,-2) M18(6.8,-2) N1(-6.8,-2.8) N2(-6,-2.8) N3(-5.2,-2.8) N4(-4.4,-2.8) N5(-3.6,-2.8) N6(-2.8,-2.8) N7(-2,-2.8) N8(-1.2,-2.8) N9(-0.4,-2.8) N10(0.4,-2.8) N11(1.2,-2.8) N12(2,-2.8) N13(2.8,-2.8) N14(3.6,-2.8) N15(4.4,-2.8) N16(5.2,-2.8) N17(6,-2.8) N18(6.8,-2.8) P1(-6.8,-3.6) P2(-6,-3.6) P3(-5.2,-3.6) P4(-4.4,-3.6) P5(-3.6,-3.6) P6(-2.8,-3.6) P7(-2,-3.6) P8(-1.2,-3.6) P9(-0.4,-3.6) P10(0.4,-3.6) P11(1.2,-3.6) P12(2,-3.6) P13(2.8,-3.6) P14(3.6,-3.6) P15(4.4,-3.6) P16(5.2,-3.6) P17(6,-3.6) P18(6.8,-3.6) R1(-6.8,-4.4) R2(-6,-4.4) R3(-5.2,-4.4) R4(-4.4,-4.4) R5(-3.6,-4.4) R6(-2.8,-4.4) R7(-2,-4.4) R8(-1.2,-4.4) R9(-0.4,-4.4) R10(0.4,-4.4) R11(1.2,-4.4) R12(2,-4.4) R13(2.8,-4.4) R14(3.6,-4.4) R15(4.4,-4.4) R16(5.2,-4.4) R17(6,-4.4) R18(6.8,-4.4) T1(-6.8,-5.2) T2(-6,-5.2) T3(-5.2,-5.2) T4(-4.4,-5.2) T5(-3.6,-5.2) T6(-2.8,-5.2) T7(-2,-5.2) T8(-1.2,-5.2) T9(-0.4,-5.2) T10(0.4,-5.2) T11(1.2,-5.2) T12(2,-5.2) T13(2.8,-5.2) T14(3.6,-5.2) T15(4.4,-5.2) T16(5.2,-5.2) T17(6,-5.2) T18(6.8,-5.2) U1(-6.8,-6) U2(-6,-6) U3(-5.2,-6) U4(-4.4,-6) U5(-3.6,-6) U6(-2.8,-6) U7(-2,-6) U8(-1.2,-6) U9(-0.4,-6) U10(0.4,-6) U11(1.2,-6) U12(2,-6) U13(2.8,-6) U14(3.6,-6) U15(4.4,-6) U16(5.2,-6) U17(6,-6) U18(6.8,-6) V1(-6.8,-6.8) V2(-6,-6.8) V3(-5.2,-6.8) V4(-4.4,-6.8) V5(-3.6,-6.8) V6(-2.8,-6.8) V7(-2,-6.8) V8(-1.2,-6.8) V9(-0.4,-6.8) V10(0.4,-6.8) V11(1.2,-6.8) V12(2,-6.8) V13(2.8,-6.8) V14(3.6,-6.8) V15(4.4,-6.8) V16(5.2,-6.8) V17(6,-6.8) V18(6.8,-6.8)
  Top Layer lines w0.095: 7.365,1.6 6.4,1.6 ; 6.401,1.601 6,1.2
  Top Layer lines w0.121: 7.5,0.4 6.8,0.4 ; 7.5,-0.4 6.8,-0.4 ; 7.5,-1.2 6.8,-1.2 ; 7.5,-2 6.8,-2 ; 7.5,-2.8 6.8,-2.8 ; 7.5,-3.6 6.8,-3.6 ; 5.6,5.6 5.2,5.2 ; 5.6,4.8 5.2,4.4 ; 5.6,4 5.2,3.6 ; 5.6,3.2 5.2,2.8 ; 5.6,2.4 5.2,2 ; 5.6,1.6 5.2,1.2 ; 5.6,0.8 5.2,0.4 ; 5.6,-1.6 5.2,-1.2 ; 5.6,-2.4 5.2,-2 ; 5.6,-3.2 5.2,-2.8 ; 5.6,-4 5.2,-3.6 ; 5.6,-5.6 5.2,-5.2 ; 5.6,-6.4 5.2,-6 ; 4.8,5.6 4.4,5.2 ; 4.8,4.8 4.4,4.4 ; 4.8,4 4.4,3.6 ; 4.8,3.2 4.4,2.8 ; 4.8,2.4 4.4,2 ; 4.8,1.6 4.4,1.2 ; 4.8,0.8 4.4,0.4 ; 4.8,-0.8 4.4,-0.4 ; 4.8,-1.6 4.4,-1.2 ; 4.8,-2.4 4.4,-2 ; 4.8,-3.2 4.4,-2.8 ; 4.8,-4 4.4,-3.6 ; 4.8,-4.8 4.4,-4.4 ; 4.8,-5.6 4.4,-5.2 ; 4.8,-6.4 4.4,-6 ; 4,5.6 3.6,5.2 ; 4,4.8 3.6,4.4 ; 4,-4.8 3.6,-4.4 ; 4,-5.6 3.6,-5.2 ; 4,-6.4 3.6,-6 ; 3.2,5.6 2.8,5.2 ; 3.2,4.8 2.8,4.4 ; 3.2,-5.6 2.8,-5.2 ; 2.4,5.6 2,5.2 ; 2.4,4.8 2,4.4 ; 2.4,-5.6 2,-5.2 ; 1.6,5.6 1.2,5.2 ; 1.6,4.8 1.2,4.4 ; 1.6,-5.6 1.2,-5.2 ; 0.8,5.6 0.4,5.2 ; 0.8,4.8 0.4,4.4 ; 0.8,-4.8 0.4,-4.4 ; 0.8,-5.6 0.4,-5.2 ; -0.4,5.2 -0.8,5.6 ; -0.4,-5.2 -0.8,-5.6 ; -1.2,5.2 -1.6,5.6 ; -1.2,-4.4 -1.6,-4.8 ; -1.2,-5.2 -1.6,-5.6 ; -2,5.2 -2.4,5.6 ; -2,4.4 -2.4,4.8 ; -2,-4.4 -2.4,-4.8 ; -2,-5.2 -2.4,-5.6 ; -2.8,5.2 -3.2,5.6 ; -2.8,4.4 -3.2,4.8 ; -2.8,-5.2 -3.2,-5.6 ; -2.8,-6 -3.2,-6.4 ; -2.8,-6.8 -3.2,-7.2 ; -3.6,5.2 -4,5.6 ; -3.6,4.4 -4,4.8 ; -3.6,-4.4 -4,-4.8 ; -3.6,-5.2 -4,-5.6 ; -4,0.8 -4.4,0.4 ; -4.4,5.2 -4.8,5.6 ; -4.4,3.6 -4.8,4 ; -4.4,1.2 -4.8,0.8 ; -4.4,-0.4 -4.8,0 ; -4.4,-2 -4.8,-2.4 ; -4.4,-2.8 -4.8,-3.2 ; -4.4,-3.6 -4.8,-4 ; -4.4,-4.4 -4.8,-4.8 ; -4.4,-5.2 -4.8,-5.6 ; -4.4,-6 -4.8,-6.4 ; -4.4,-6.8 -4.8,-7.2 ; -4.8,1.6 -5.2,1.2 ; -5.2,5.2 -5.6,5.6 ; -5.2,3.6 -5.6,4 ; -5.2,2 -5.601,2.4 ; -5.2,0.4 -5.6,0.8 ; -5.2,-0.4 -5.6,-0.8 ; -5.2,-1.2 -5.6,-1.6 ; -5.2,-2 -5.6,-2.4 ; -5.2,-3.6 -5.6,-4 ; -5.2,-4.4 -5.6,-4.8 ; -5.2,-5.2 -5.6,-5.6 ; -5.2,-6 -5.6,-6.4 ; -5.2,-6.8 -5.6,-7.2 ; -5.6,2.4 -6.4,2.4 ; -5.6,0 -6,-0.4 ; -6,3.6 -6.4,4
  Top Layer lines w0.254: 5.6,-0.8 5.2,-0.4 ; 4,4 3.6,3.6 ; 4,2.4 3.6,2.8 ; 3.6,1.2 4,0.8 3.6,0.4 ; 3.6,-0.4 4,-0.8 3.6,-1.2 ; 3.6,-2 4,-2.4 3.6,-2.8 3.6,-3.6 ; 3.2,4 2.8,3.6 ; 3.2,-4 2.8,-3.6 ; 3.2,-4.8 2.8,-4.4 ; 2.8,2.8 2.4,2.4 ; 2.8,2 2.4,1.6 2,2 ; 2.8,1.2 3.2,0.8 2.8,0.4 ; 2.8,-0.4 3.2,-0.8 2.8,-1.2 ; 2.8,-2 3.2,-2.4 2.8,-2.8 ; 2.4,4 2,3.6 1.2,3.6 ; 2.4,3.2 2,2.8 ; 2.4,-0.8 2,-0.4 2,0.4 ; 2.4,-1.6 2,-1.2 ; 2.4,-2.4 2,-2 ; 2.4,-3.2 2,-2.8 ; 2.4,-4 2,-3.6 ; 2.4,-4.8 2,-4.4 ; 2,1.2 1.6,0.8 1.2,0.4 ; 1.6,1.6 1.2,1.2 ; 1.6,-0.8 1.2,-0.4 ; 1.6,-1.6 1.2,-1.2 ; 1.6,-4 1.2,-3.6 ; 1.6,-4.8 1.2,-4.4 ; 1.2,2.8 0.8,3.2 0.4,2.8 ; 1.2,2 0.8,2.4 0.4,2 ; 1.2,-2 0.8,-1.6 0.4,-1.2 ; 1.2,-2.8 0.8,-2.4 0.4,-2 ; 0.8,4 0.4,3.6 ; 0.8,1.6 0.4,1.2 ; 0.8,0.8 0.4,0.4 ; 0.8,-0.8 0.4,-0.4 ; 0.8,-3.2 0.4,-2.8 ; 0.4,-3.6 -0.4,-4.4 -0.8,-4 ; -0.4,4.4 -0.8,4.8 -1.2,4.4 -1.6,4 ; -0.4,3.6 -0.8,4 -1.2,3.6 ; -0.4,2.8 -0.8,3.2 -1.2,2.8 ; -0.4,2 -0.8,2.4 ; -0.4,1.2 -0.8,0.8 ; -0.4,0.4 -0.8,0.8 ; -0.4,-0.4 -0.8,-0.8 -0.4,-1.2 ; -0.4,-2 -0.8,-1.6 ; -0.4,-2.8 -0.466,-2.734 -1.134,-2.734 -1.2,-2.8 -2,-2.8 -2.4,-3.2 -2.8,-2.8 -3.2,-2.4 -2.8,-2 ; -0.4,-3.6 -0.8,-3.2 -1.2,-3.6 ; -1.2,1.2 -1.6,1.6 -2,2 ; -1.2,0.4 -0.8,0.8 ; -1.2,-0.4 -1.6,-0.8 ; -1.2,-1.2 -1.6,-1.6 ; -1.2,-2 -1.359,-2.159 -1.841,-2.159 -2,-2 -2.4,-2.4 ; -1.2,-3.6 -1.6,-4 ; -1.6,0.8 -2,0.4 ; -1.6,-4 -2,-3.6 ; -2,3.6 -2.4,4 ; -2,2.8 -2.4,2.4 -2.8,2.8 ; -2,1.2 -2.4,1.6 -2.8,1.2 ; -2,-0.4 -2.4,-0.8 ; -2,-1.2 -2.4,-1.6 ; -2,-3.6 -2.4,-4 ; -2.4,0.8 -2.8,0.4 ; -2.4,-4 -2.8,-3.6 ; -2.8,3.6 -3.2,4 ; -2.8,2 -3.2,2.4 ; -2.8,-0.4 -3.2,-0.8 -2.8,-1.2 ; -3.2,0.8 -3.6,0.4 ; -3.2,0.8 -3.6,1.2 ; -3.6,2.8 -4,2.4 ; -3.6,-0.4 -4,-0.8 ; -3.6,-2 -4,-2.4 ; -3.6,-3.6 -4,-4 ; -3.6,3.6 -4,4 ; -3.6,2 -4,2.4 ; -3.6,-1.2 -4,-0.8 ; -3.6,-2.8 -4,-2.4 ; -4.399,4.399 -4.8,4.8 ; -4.4,-1.2 -4.8,-1.6 ; -4.4,2.8 -4.8,3.2 ; -5.199,4.399 -5.6,4.8 ; -5.2,2.8 -5.6,3.2 ; -6.8,-6.8 -7.2,-7.2
  silkscreen extent -8.27,-7.5 7.5,7.5, body extent -7.5,-7.5 7.5,7.5, height 1.4
CAP6.6x6.6 [mm] "Aluminum Electrolytic Capacitor, Body 6.60x6.60x5.50mm, IPC Low Density"
  rect 3.45x1.8 smd: 1(-2.55,0) 2(2.55,0)
  silkscreen extent -3.4,-3.4 3.4,3.4, body extent -3.5,-3.4 3.5,3.4, height 5.5
CAP0402 [mm] "Chip Capacitor, 2-Leads, Body 1.00x0.50mm, IPC Medium Density"
  rect 0.66x0.62 smd: 1(-0.44,0) 2(0.44,0)
  body extent -0.53,-0.28 0.53,0.28, height 0.55
CAP0805 [mm] "Chip Capacitor, 2-Leads, Body 2.00x1.25mm, IPC Medium Density"
  rect 0.9x1.45 smd: 1(-1.025,0) 2(1.025,0)
  silkscreen extent -0.2,-0.63 0.2,0.63, body extent -1.1,-0.72 1.1,0.73, height 1.45
CONN3-PWR-PJ102A [mil] "CONN3-PWR-PJ102A"
  oval 70x180 hole 40 mask+2: 1(-245,0)
  oval 70x150 hole 40 mask+2: 2(-9,0)
  oval 150x70 hole 40 mask+2: 3(-127,185)
  silkscreen extent -280,-180 295,180
CONN19_HDMI [mm] "CONN19_HDMI"
  rect 0.23x0.85 smd mask+0.051: 1(-1.8,-3.265) 3(-1.4,-3.265) 5(-1,-3.265) 7(-0.6,-3.265) 9(-0.2,-3.265) 11(0.2,-3.265) 13(0.6,-3.265) 15(1,-3.265) 17(1.4,-3.265) 19(1.8,-3.265)
  rect 0.23x1 smd mask+0.051: 2(-1.6,-2.04) 4(-1.2,-2.04) 6(-0.8,-2.04) 8(-0.4,-2.04) 10(0,-2.04) 12(0.4,-2.04) 14(0.8,-2.04) 16(1.2,-2.04) 18(1.6,-2.04)
  oval 1.651x2.54 hole 0.381 mask+0.051: 20(-3.1,1.5) 21(3.1,1.5)
  rect 2.4x1.38 smd mask+0.051: 22(-3.45,-1.86) 23(3.45,-1.86)
  silkscreen extent -3.25,-3.6 3.25,3.9
FB0805 [mm] "Chip Inductor, 2-Leads, Body 2.00x1.25mm, IPC Medium Density"
  rect 1.17x1.47 smd: 1(-0.87,0) 2(0.87,0)
  body extent -1.1,-0.72 1.1,0.72, height 1.1
HEADER10X2_SMD [mil] "HEADER10X2_SMD"
  rect 28x110 smd mask+2: 1(225,106.5) 2(225,-106.5) 3(175,106.5) 4(175,-106.5) 5(125,106.5) 6(125,-106.5) 7(75,106.5) 8(75,-106.5) 9(25,106.5) 10(25,-106.5) 11(-25,106.5) 12(-25,-106.5) 13(-75,106.5) 14(-75,-106.5) 15(-125,106.5) 16(-125,-106.5) 17(-175,106.5) 18(-175,-106.5) 19(-225,106.5) 20(-225,-106.5)
  silkscreen extent -250,-150 250,150
HEADER23X2 [mil] "HEADER23X2"
  rect 60x60 hole 30 mask+2: 1(-1100,-50)
  round 60 hole 30 mask+2: 2(-1100,50) 3(-1000,-50) 4(-1000,50) 5(-900,-50) 6(-900,50) 7(-800,-50) 8(-800,50) 9(-700,-50) 10(-700,50) 11(-600,-50) 12(-600,50) 13(-500,-50) 14(-500,50) 15(-400,-50) 16(-400,50) 17(-300,-50) 18(-300,50) 19(-200,-50) 20(-200,50) 21(-100,-50) 22(-100,50) 23(0,-50) 24(0,50) 25(100,-50) 26(100,50) 27(200,-50) 28(200,50) 29(300,-50) 30(300,50) 31(400,-50) 32(400,50) 33(500,-50) 34(500,50) 35(600,-50) 36(600,50) 37(700,-50) 38(700,50) 39(800,-50) 40(800,50) 41(900,-50) 42(900,50) 43(1000,-50) 44(1000,50) 45(1100,-50) 46(1100,50)
  silkscreen extent -1150,-100 1150,100
HVQFN-64 [mm] "QFN, 64-Leads, Body 9.00x9.00mm, Pitch 0.50mm, Thermal Pad 5.10x5.10mm, IPC Medium Density"
  oval 0.95x0.25 smd mask+0.05: 1(-4.375,3.75) 2(-4.375,3.25) 3(-4.375,2.75) 4(-4.375,2.25) 5(-4.375,1.75) 6(-4.375,1.25) 7(-4.375,0.75) 8(-4.375,0.25) 9(-4.375,-0.25) 10(-4.375,-0.75) 11(-4.375,-1.25) 12(-4.375,-1.75) 13(-4.375,-2.25) 14(-4.375,-2.75) 15(-4.375,-3.25) 16(-4.375,-3.75) 33(4.375,-3.75) 34(4.375,-3.25) 35(4.375,-2.75) 36(4.375,-2.25) 37(4.375,-1.75) 38(4.375,-1.25) 39(4.375,-0.75) 40(4.375,-0.25) 41(4.375,0.25) 42(4.375,0.75) 43(4.375,1.25) 44(4.375,1.75) 45(4.375,2.25) 46(4.375,2.75) 47(4.375,3.25) 48(4.375,3.75)
  oval 0.25x0.95 smd mask+0.05: 17(-3.75,-4.375) 18(-3.25,-4.375) 19(-2.75,-4.375) 20(-2.25,-4.375) 21(-1.75,-4.375) 22(-1.25,-4.375) 23(-0.75,-4.375) 24(-0.25,-4.375) 25(0.25,-4.375) 26(0.75,-4.375) 27(1.25,-4.375) 28(1.75,-4.375) 29(2.25,-4.375) 30(2.75,-4.375) 31(3.25,-4.375) 32(3.75,-4.375) 49(3.75,4.375) 50(3.25,4.375) 51(2.75,4.375) 52(2.25,4.375) 53(1.75,4.375) 54(1.25,4.375) 55(0.75,4.375) 56(0.25,4.375) 57(-0.25,4.375) 58(-0.75,4.375) 59(-1.25,4.375) 60(-1.75,4.375) 61(-2.25,4.375) 62(-2.75,4.375) 63(-3.25,4.375) 64(-3.75,4.375)
  rect 5.1x5.1 smd: 65(0,0)
  silkscreen extent -5.47,-4.7 4.7,4.7, body extent -4.55,-4.55 4.55,4.55, height 1
LED_0603 [mil] "LED_0603"
  rect 30x40 smd mask+2: 1(-32.5,0) 2(32.5,0)
  silkscreen extent -70,-35 60,35
MTGH200C125D_PL [mil] "MTGH200C125D_PL"
  round 175 hole 125 mask+2: 1(-15.5,0)
OSC4_61X65LS_79X98SMD [mil] "OSC4_61X65LS_79X98SMD"
  rect 28x35 smd mask+2: 1(-32.5,-30.5) 2(32.5,-30.5) 3(32.5,30.5) 4(-32.5,30.5)
  silkscreen extent -62,-62 62,62
PVQFN-48 [mm] "QFN, 48-Leads, Body 6.00x6.00mm, Pitch 0.40mm, Thermal Pad 2.80x2.80mm, IPC Medium Density"
  oval 0.85x0.2 smd mask+0.05: 1(-2.975,2.2) 2(-2.975,1.8) 3(-2.975,1.4) 4(-2.975,1) 5(-2.975,0.6) 6(-2.975,0.2) 7(-2.975,-0.2) 8(-2.975,-0.6) 9(-2.975,-1) 10(-2.975,-1.4) 11(-2.975,-1.8) 12(-2.975,-2.2) 25(2.975,-2.2) 26(2.975,-1.8) 27(2.975,-1.4) 28(2.975,-1) 29(2.975,-0.6) 30(2.975,-0.2) 31(2.975,0.2) 32(2.975,0.6) 33(2.975,1) 34(2.975,1.4) 35(2.975,1.8) 36(2.975,2.2)
  oval 0.2x0.85 smd mask+0.05: 13(-2.2,-2.975) 14(-1.8,-2.975) 15(-1.4,-2.975) 16(-1,-2.975) 17(-0.6,-2.975) 18(-0.2,-2.975) 19(0.2,-2.975) 20(0.6,-2.975) 21(1,-2.975) 22(1.4,-2.975) 23(1.8,-2.975) 24(2.2,-2.975) 37(2.2,2.975) 38(1.8,2.975) 39(1.4,2.975) 40(1,2.975) 41(0.6,2.975) 42(0.2,2.975) 43(-0.2,2.975) 44(-0.6,2.975) 45(-1,2.975) 46(-1.4,2.975) 47(-1.8,2.975) 48(-2.2,2.975)
  rect 4.05x4.05 smd: 49(0,0)
  silkscreen extent -4,-3.22 3.22,3.22, body extent -3.08,-3.08 3.08,3.08, height 1
QFN-32 [mm] "QFN, 32-Leads, Body 5.00x5.00mm, Pitch 0.50mm, Thermal Pad 3.20x3.20mm, IPC Medium Density"
  oval 0.69x0.24 smd mask+0.05: 1(-2.37,1.75) 2(-2.37,1.25) 3(-2.37,0.75) 4(-2.37,0.25) 5(-2.37,-0.25) 6(-2.37,-0.75) 7(-2.37,-1.25) 8(-2.37,-1.75) 17(2.37,-1.75) 18(2.37,-1.25) 19(2.37,-0.75) 20(2.37,-0.25) 21(2.37,0.25) 22(2.37,0.75) 23(2.37,1.25) 24(2.37,1.75)
  oval 0.24x0.69 smd mask+0.05: 9(-1.75,-2.37) 10(-1.25,-2.37) 11(-0.75,-2.37) 12(-0.25,-2.37) 13(0.25,-2.37) 14(0.75,-2.37) 15(1.25,-2.37) 16(1.75,-2.37) 25(1.75,2.37) 26(1.25,2.37) 27(0.75,2.37) 28(0.25,2.37) 29(-0.25,2.37) 30(-0.75,2.37) 31(-1.25,2.37) 32(-1.75,2.37)
  rect 3.2x3.2 smd: 33(0,0)
  silkscreen extent -3.47,2.43 -3.22,2.67, body extent -2.55,-2.55 2.55,2.55, height 1
RES0402 [mm] "Chip Resistor, 2-Leads, Body 1.00x0.50mm, IPC Medium Density"
  rect 0.55x0.55 smd: 1(-0.45,0) 2(0.45,0)
  body extent -0.52,-0.28 0.53,0.28, height 0.4
RJ45-7499010211A [mil] "RJ45-7499010211A"
  rect 60x60 hole 40 mask+2: 1(-175,252.5)
  round 60 hole 40 mask+2: 2(-125,352.5) 3(-75,252.5) 4(-25,352.5) 5(25,252.5) 6(75,352.5) 7(125,252.5) 8(175,352.5) 9(-249,-190.5) 10(-149,-130.5) 11(149,-190.5) 12(249,-130.5)
  round 90 hole 63 mask+2: 13(-310,122.5) 14(310,122.5)
  round 40 / inner round 150 / far side round 40 hole 128 mask+2: " "(-225,2.5) " "(225,2.5)
  Multi-Layer keep-out circle w1: c225,2.5 r81
  Multi-Layer keep-out circle w1: c-225,2.5 r81
  silkscreen extent -313,-426 313,435
SD-MICRO-SCHA5B0300 [mil] "SD-MICRO-SCHA5B0300"
  rect 36x18 smd mask+2: 1(285.72,130) 2(285.72,157.56) 3(285.72,185.12) 4(285.72,212.68) 5(-285.72,212.68) 6(-285.72,185.12) 7(-285.72,157.56) 8(-285.72,130)
  rect 20x35 smd mask+2: 9(-148.62,-263.28) 10(235.24,-263.28)
  rect 35x79 smd mask+2: 11(285.43,-170.59) 12(-285.43,-119.41)
  rect 44x60 smd mask+2: 13(283.32,262.48) 14(-283.32,262.48)
  rect 47x43 smd mask+2: 15(134.84,-282.91) 16(-101.37,-282.91)
  silkscreen extent -288,-288 288,315
SIP6 [mil] "SIP6"
  rect 60x60 hole 40 mask+2: 1(0,250)
  round 60 hole 40 mask+2: 2(0,150) 3(0,50) 4(0,-50) 5(0,-150) 6(0,-250)
  silkscreen extent -50,-300 50,300
SOD323 [mil] "SOD323"
  rect 31.5x31.5 smd mask+2: 1(44.29,0) 2(-44.29,0)
  silkscreen extent -65,-35 95,35
SOIC-8 [mm] "SOIC, 8-Leads, Body 4.90x3.90mm, Pitch 1.27mm, IPC Medium Density"
  oval 1.45x0.6 smd: 1(-2.725,1.905) 2(-2.725,0.635) 3(-2.725,-0.635) 4(-2.725,-1.905) 5(2.725,-1.905) 6(2.725,-0.635) 7(2.725,0.635) 8(2.725,1.905)
  silkscreen extent -2.85,-2.5 1.6,2.88, body extent -3,-2.5 3,2.5, height 1.75
SOJ-4 [mm] "SOJ, 4-Leads, Body 8.00x3.80mm, Pitch 5.50mm, IPC Low Density"
  oval 1.7x0.75 smd: 1(-1.225,2.75) 2(-1.225,-2.75) 3(1.225,-2.75) 4(1.225,2.75)
  silkscreen extent -0.12,-4.62 0.12,4, body extent -1.9,-4 1.9,4, height 2.5
SOT-23-5 [mm] "SOT23, 5-Leads, Body 2.90x2.70mm, Pitch 0.95mm, IPC Medium Density"
  rect 1.1x0.6 smd: 1(-1.4,0.95) 2(-1.4,0) 3(-1.4,-0.95) 4(1.4,-0.95) 5(1.4,0.95)
  silkscreen extent -1.52,-1.55 0.5,1.93, body extent -1.7,-1.55 1.7,1.55, height 1.45
SW4SMD_63X161LS [mil] "SW4SMD_63X161LS"
  rect 35x40 smd mask+2: 1(-80.71,-31.5) 2(-80.71,31.5) 3(80.71,-31.5) 4(80.71,31.5)
  silkscreen extent -108,-59 108,59
tp1-8040 [mil] "TP1-8040"
  round 60 hole 40 mask+2: 1(0,0)
  silkscreen extent -50,-50 50,50
TSSOP10 [mil] "TSSOP10"
  rect 12x75 smd mask+2: 1(-39.37,-78)
  rect 12x65 smd mask+2: 2(-19.69,-83) 3(0,-83) 4(19.69,-83) 5(39.37,-83) 6(39.37,83) 7(19.69,83) 8(0,83) 9(-19.69,83) 10(-39.37,83)
  silkscreen extent -63,-138 63,138
U_6_DRY [mil] "U_6_DRY"
  rect 12x20 smd mask+2: 1(-19.68,-17.28) 2(0,-17.28) 3(19.68,-17.28) 4(19.68,17.28) 5(0,17.28) 6(-19.68,17.28)
  silkscreen extent -30,-21 30,21
USB5MINI_4SHIELDED_SMD-5 [mm] "USB5MINI_4SHIELDED_SMD-5"
  rect 1.4x0.5 smd mask+0.051: 1(-3,-1.6) 2(-3,-0.8) 3(-3,0) 4(-3,0.8) 5(-3,1.6)
  rect 3.81x2.54 smd mask+0.051: 6(-0.6,-4.2) 7(-0.6,4.2)
  rect 0.8x2.35 smd mask+0.051: 8(2.2,-2.675) 9(2.2,2.675)
  Top Layer keep-out region: 1.35,-3.9 1.75,-3.9 1.75,-1.45 2.65,-1.45 2.65,-3.9 3.1,-3.9 3.1,3.9 2.65,3.9 2.65,1.45 1.75,1.45 1.75,3.9 1.35,3.9 1.35,2.9 1,2.9 1,1.5 -0.5,1.5 -0.5,-1.5 1,-1.5 1,-2.9 1.35,-2.9 1.35,-3.9
  silkscreen extent -3.4,-3.85 3.6,3.85
USB_A [mil] "USB_A_SH"
  round 65 hole 40 mask+2: 1(-137.1,235.7) 2(-38.7,235.7) 3(40.1,235.7) 4(138.5,235.7)
  oval 80x135 hole 47.24 slot 90.55 at 90 deg mask+2: 5(-258,129) 6(259.4,129)
  silkscreen extent -258,-276 258,276, body extent -285,-276 285,276, height 305
VSSOP-8 [mm] "TSOP, 8-Leads, Body 2.95x2.80mm, Pitch 0.65mm, Thermal Pad 0.00x0.00mm, IPC Medium Density"
  oval 1.55x0.25 smd: 1(-1.7,0.975) 2(-1.7,0.325) 3(-1.7,-0.325) 4(-1.7,-0.975) 5(1.7,-0.975) 6(1.7,-0.325) 7(1.7,0.325) 8(1.7,0.975)
  silkscreen extent -1.82,-1.6 1.05,1.77, body extent -2,-1.6 2,1.6, height 1.3
WFBGA-153 [mil] "BGA, 153-Leads, Body 11.50x13.00mmx1.00mm, Pitch 0.50mm"
  round 10 smd mask+2: A1(-127.95,127.95) A2(-108.27,127.95) A3(-88.58,127.95) A4(-68.9,127.95) A5(-49.21,127.95) A6(-29.53,127.95) A7(-9.84,127.95) A8(9.84,127.95) A9(29.53,127.95) A10(49.21,127.95) A11(68.9,127.95) A12(88.58,127.95) A13(108.27,127.95) A14(127.95,127.95) B1(-127.95,108.27) B2(-108.27,108.27) B3(-88.58,108.27) B4(-68.9,108.27) B5(-49.21,108.27) B6(-29.53,108.27) B7(-9.84,108.27) B8(9.84,108.27) B9(29.53,108.27) B10(49.21,108.27) B11(68.9,108.27) B12(88.58,108.27) B13(108.27,108.27) B14(127.95,108.27) C1(-127.95,88.58) C2(-108.27,88.58) C3(-88.58,88.58) C4(-68.9,88.58) C5(-49.21,88.58) C6(-29.53,88.58) C7(-9.84,88.58) C8(9.84,88.58) C9(29.53,88.58) C10(49.21,88.58) C11(68.9,88.58) C12(88.58,88.58) C13(108.27,88.58) C14(127.95,88.58) D1(-127.95,68.9) D2(-108.27,68.9) D3(-88.58,68.9) D4(-68.9,68.9) D12(88.58,68.9) D13(108.27,68.9) D14(127.95,68.9) E1(-127.95,49.21) E2(-108.27,49.21) E3(-88.58,49.21) E5(-49.21,49.21) E6(-29.53,49.21) E7(-9.84,49.21) E8(9.84,49.21) E9(29.53,49.21) E10(49.21,49.21) E12(88.58,49.21) E13(108.27,49.21) E14(127.95,49.21) F1(-127.95,29.53) F2(-108.27,29.53) F3(-88.58,29.53) F5(-49.21,29.53) F10(49.21,29.53) F12(88.58,29.53) F13(108.27,29.53) F14(127.95,29.53) G1(-127.95,9.84) G2(-108.27,9.84) G3(-88.58,9.84) G5(-49.21,9.84) G10(49.21,9.84) G12(88.58,9.84) G13(108.27,9.84) G14(127.95,9.84) H1(-127.95,-9.84) H2(-108.27,-9.84) H3(-88.58,-9.84) H5(-49.21,-9.84) H10(49.21,-9.84) H12(88.58,-9.84) H13(108.27,-9.84) H14(127.95,-9.84) J1(-127.95,-29.53) J2(-108.27,-29.53) J3(-88.58,-29.53) J5(-49.21,-29.53) J10(49.21,-29.53) J12(88.58,-29.53) J13(108.27,-29.53) J14(127.95,-29.53) K1(-127.95,-49.21) K2(-108.27,-49.21) K3(-88.58,-49.21) K5(-49.21,-49.21) K6(-29.53,-49.21) K7(-9.84,-49.21) K8(9.84,-49.21) K9(29.53,-49.21) K10(49.21,-49.21) K12(88.58,-49.21) K13(108.27,-49.21) K14(127.95,-49.21) L1(-127.95,-68.9) L2(-108.27,-68.9) L3(-88.58,-68.9) L12(88.58,-68.9) L13(108.27,-68.9) L14(127.95,-68.9) M1(-127.95,-88.58) M2(-108.27,-88.58) M3(-88.58,-88.58) M4(-68.9,-88.58) M5(-49.21,-88.58) M6(-29.53,-88.58) M7(-9.84,-88.58) M8(9.84,-88.58) M9(29.53,-88.58) M10(49.21,-88.58) M11(68.9,-88.58) M12(88.58,-88.58) M13(108.27,-88.58) M14(127.95,-88.58) N1(-127.95,-108.27) N2(-108.27,-108.27) N3(-88.58,-108.27) N4(-68.9,-108.27) N5(-49.21,-108.27) N6(-29.53,-108.27) N7(-9.84,-108.27) N8(9.84,-108.27) N9(29.53,-108.27) N10(49.21,-108.27) N11(68.9,-108.27) N12(88.58,-108.27) N13(108.27,-108.27) N14(127.95,-108.27) P1(-127.95,-127.95) P2(-108.27,-127.95) P3(-88.58,-127.95) P4(-68.9,-127.95) P5(-49.21,-127.95) P6(-29.53,-127.95) P7(-9.84,-127.95) P8(9.84,-127.95) P9(29.53,-127.95) P10(49.21,-127.95) P11(68.9,-127.95) P12(88.58,-127.95) P13(108.27,-127.95) P14(127.95,-127.95)
  silkscreen extent -257,-256 226,256, body extent -226,-256 226,256, height 39
XTAL150SMD_125X196 [mil] "XTAL150SMD_125X196"
  rect 70x85 smd mask+2: 1(-74.8,0) 2(74.8,0)
  silkscreen extent -118,-69 118,69

## Part data
C1 C2 C4 C7 C8 C9 C10 C11 C12 C13 C14 C15: library part CAP_10uF, "MLCC 10uF 0805 SMD", Capacitance=10uF, Case/Package=0805, Case Code (Metric)=2012, Dielectric=X6S, Dielectric Material=Ceramic, Manufacturer=TDK, Max Operating Temperature=105°C, Min Operating Temperature=-55°C, Package Quantity=4000, Supplier Part Number 1=445-7613-1-ND, Tolerance=10%, Voltage Rating=10V, Case Code (Imperial)=0805, ComponentLink3Description=Datasheet, ComponentLink3URL=https://datasheet.ciiva.com/6290/tdkmlcccaprange-6290501.pdf?src-supplier=Digi-Key, Composition=Ceramic, Depth=1.25mm, Height=1.25mm, Lead Free="Lead Free", Length=2mm, Manufacturer Part Number=C2012X6S1A106K085AC, Mount="Surface Mount", Packaging="Tape and Reel", Pricing 1="1=0.30000, 10=0.20500, 100=0.11610, 500=0.08198, 1000=0.07173 (USD)", REACH SVHC="No SVHC", RoHS=Yes, Stock 1=46852, Supplier 1=Digi-Key, Termination=SMD/SMT, Thickness=0.037inch, Voltage Rating (DC)=10V, Weight=0.000194oz, Width=0.049inch